# Altium PCB DClassAmp.PcbDoc (part 1 of 3)
Units mm, origin at the board's own origin, x right, y up, seen from the top; angles counter-clockwise.
Board outline 100 x 100 mm, 4 copper layers (Top Layer, Layer 1, Layer 2, Bottom Layer), stack 1.57 mm thick; 192 components, 70 nets, 450 pads, 316 vias.
Unrouted connection lines stored in the file: 103.
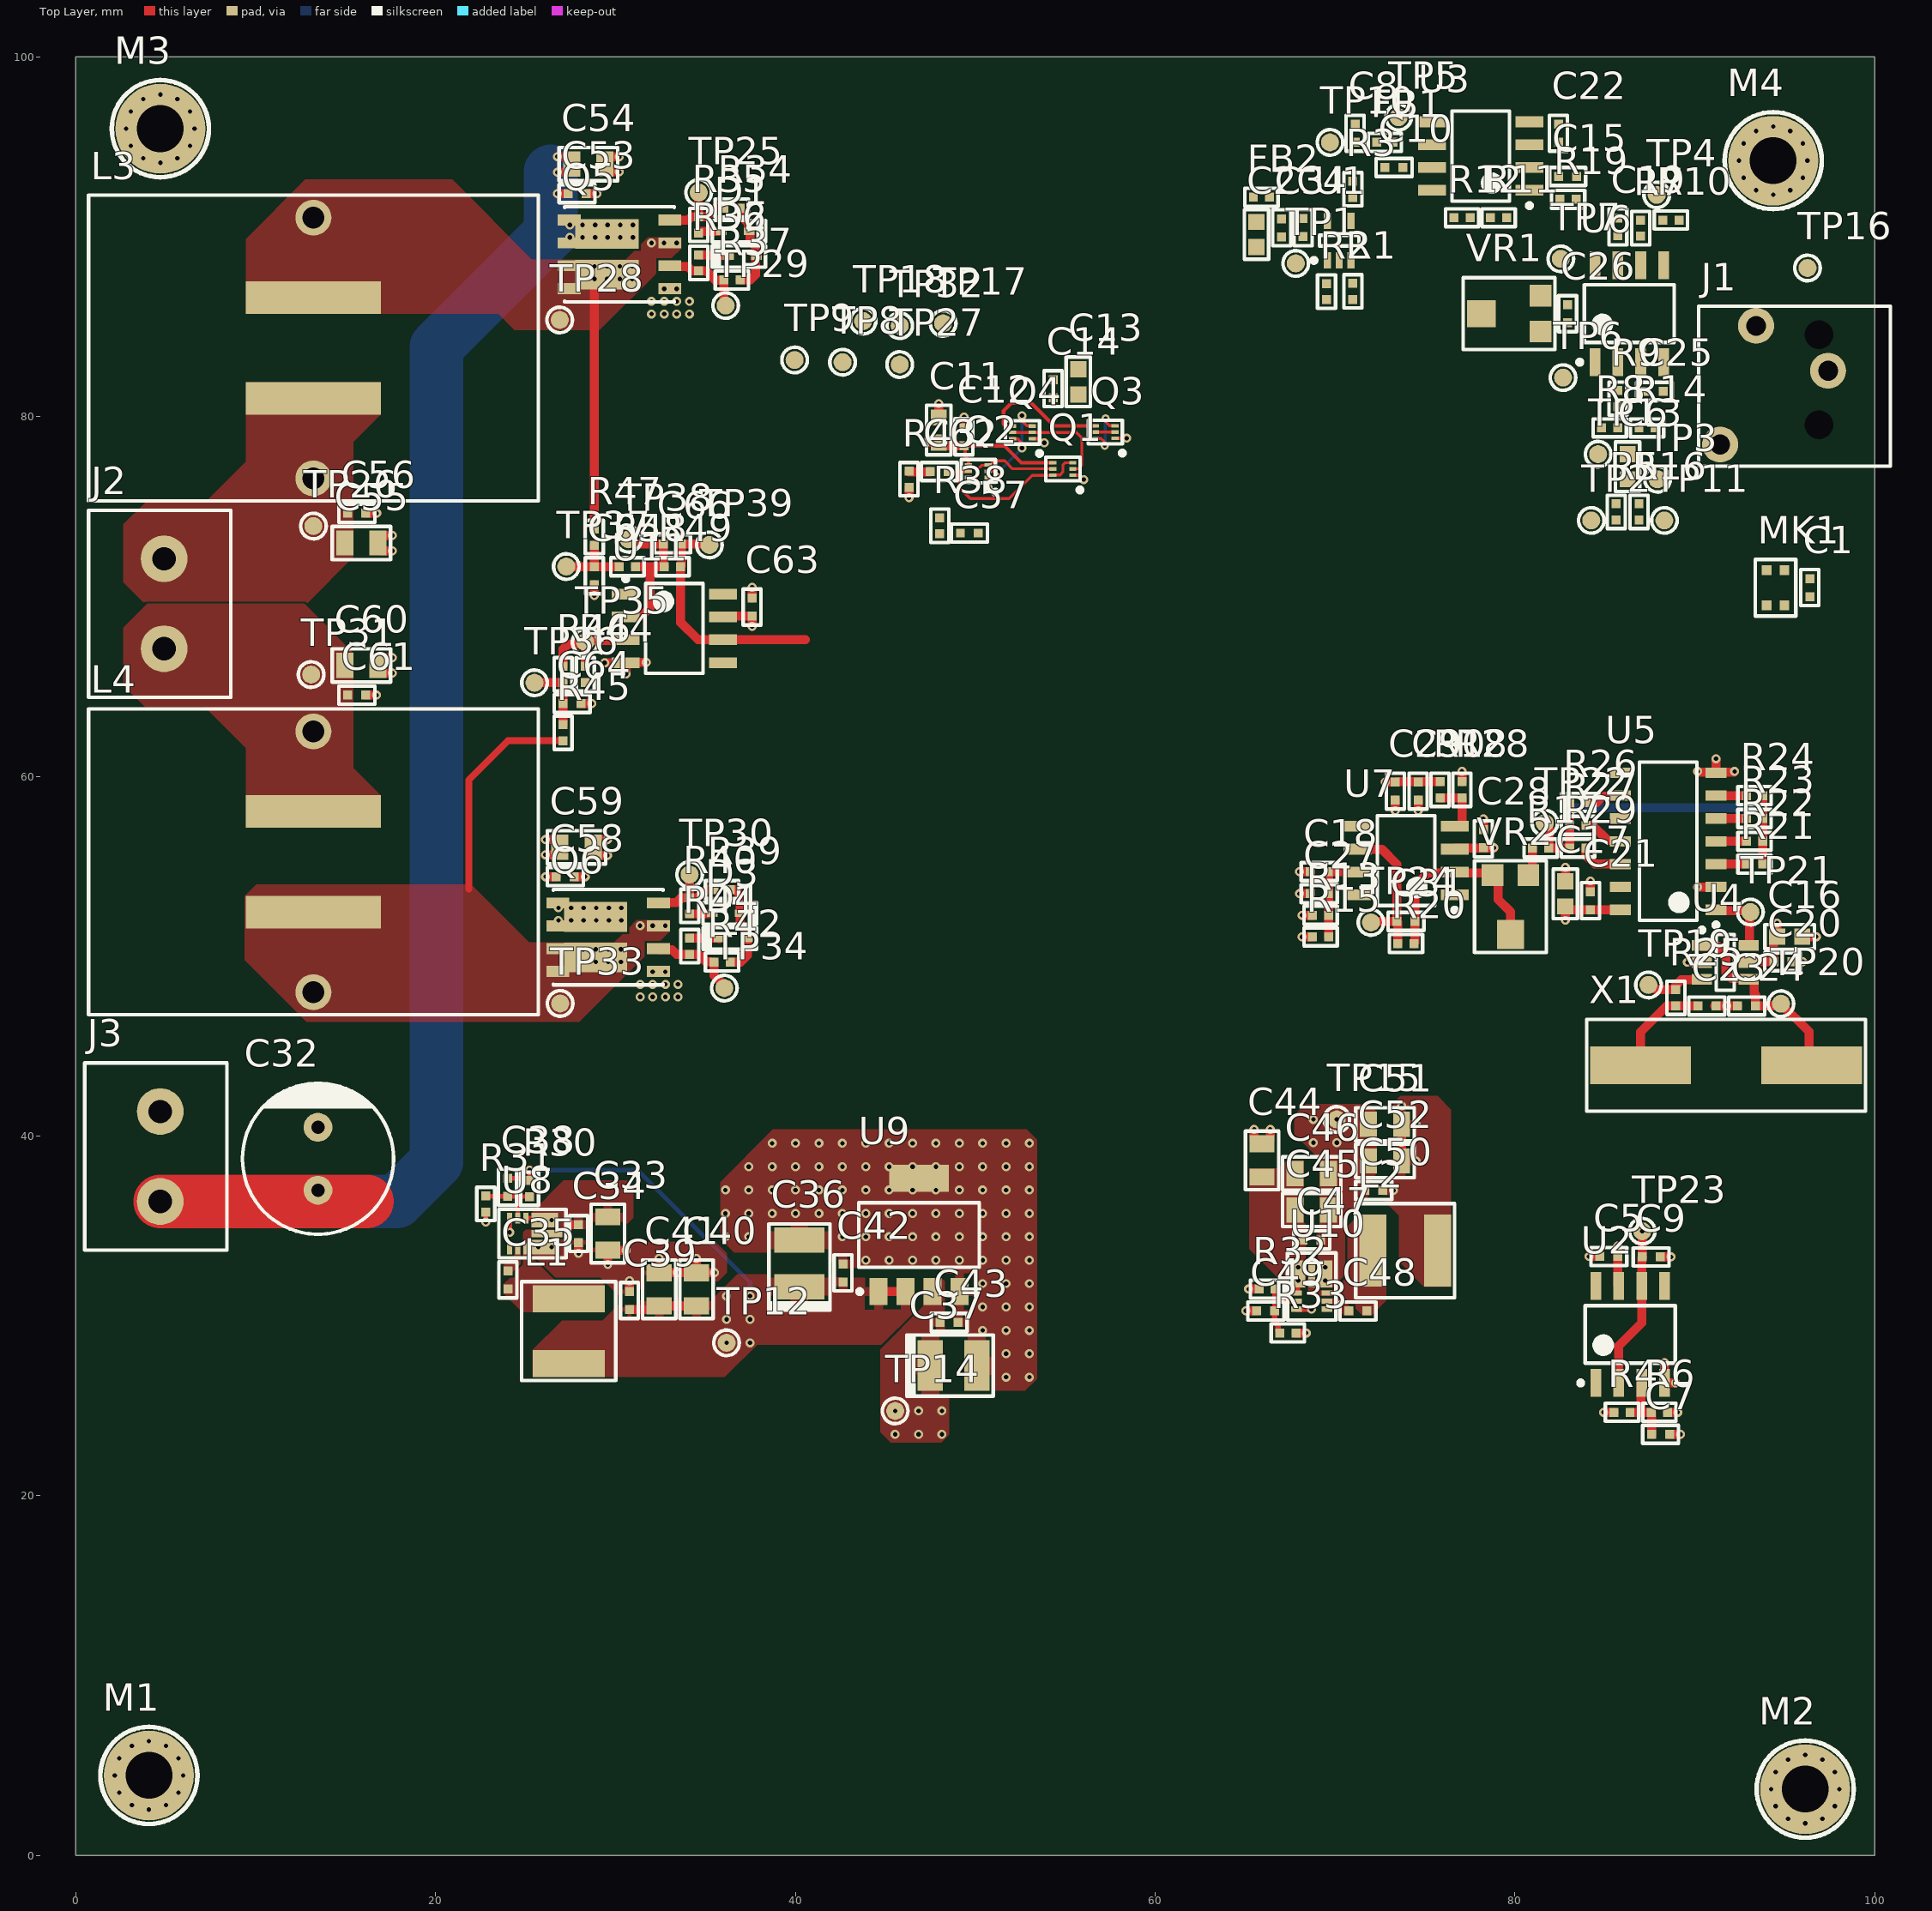
[diagram p0: Top Layer view]
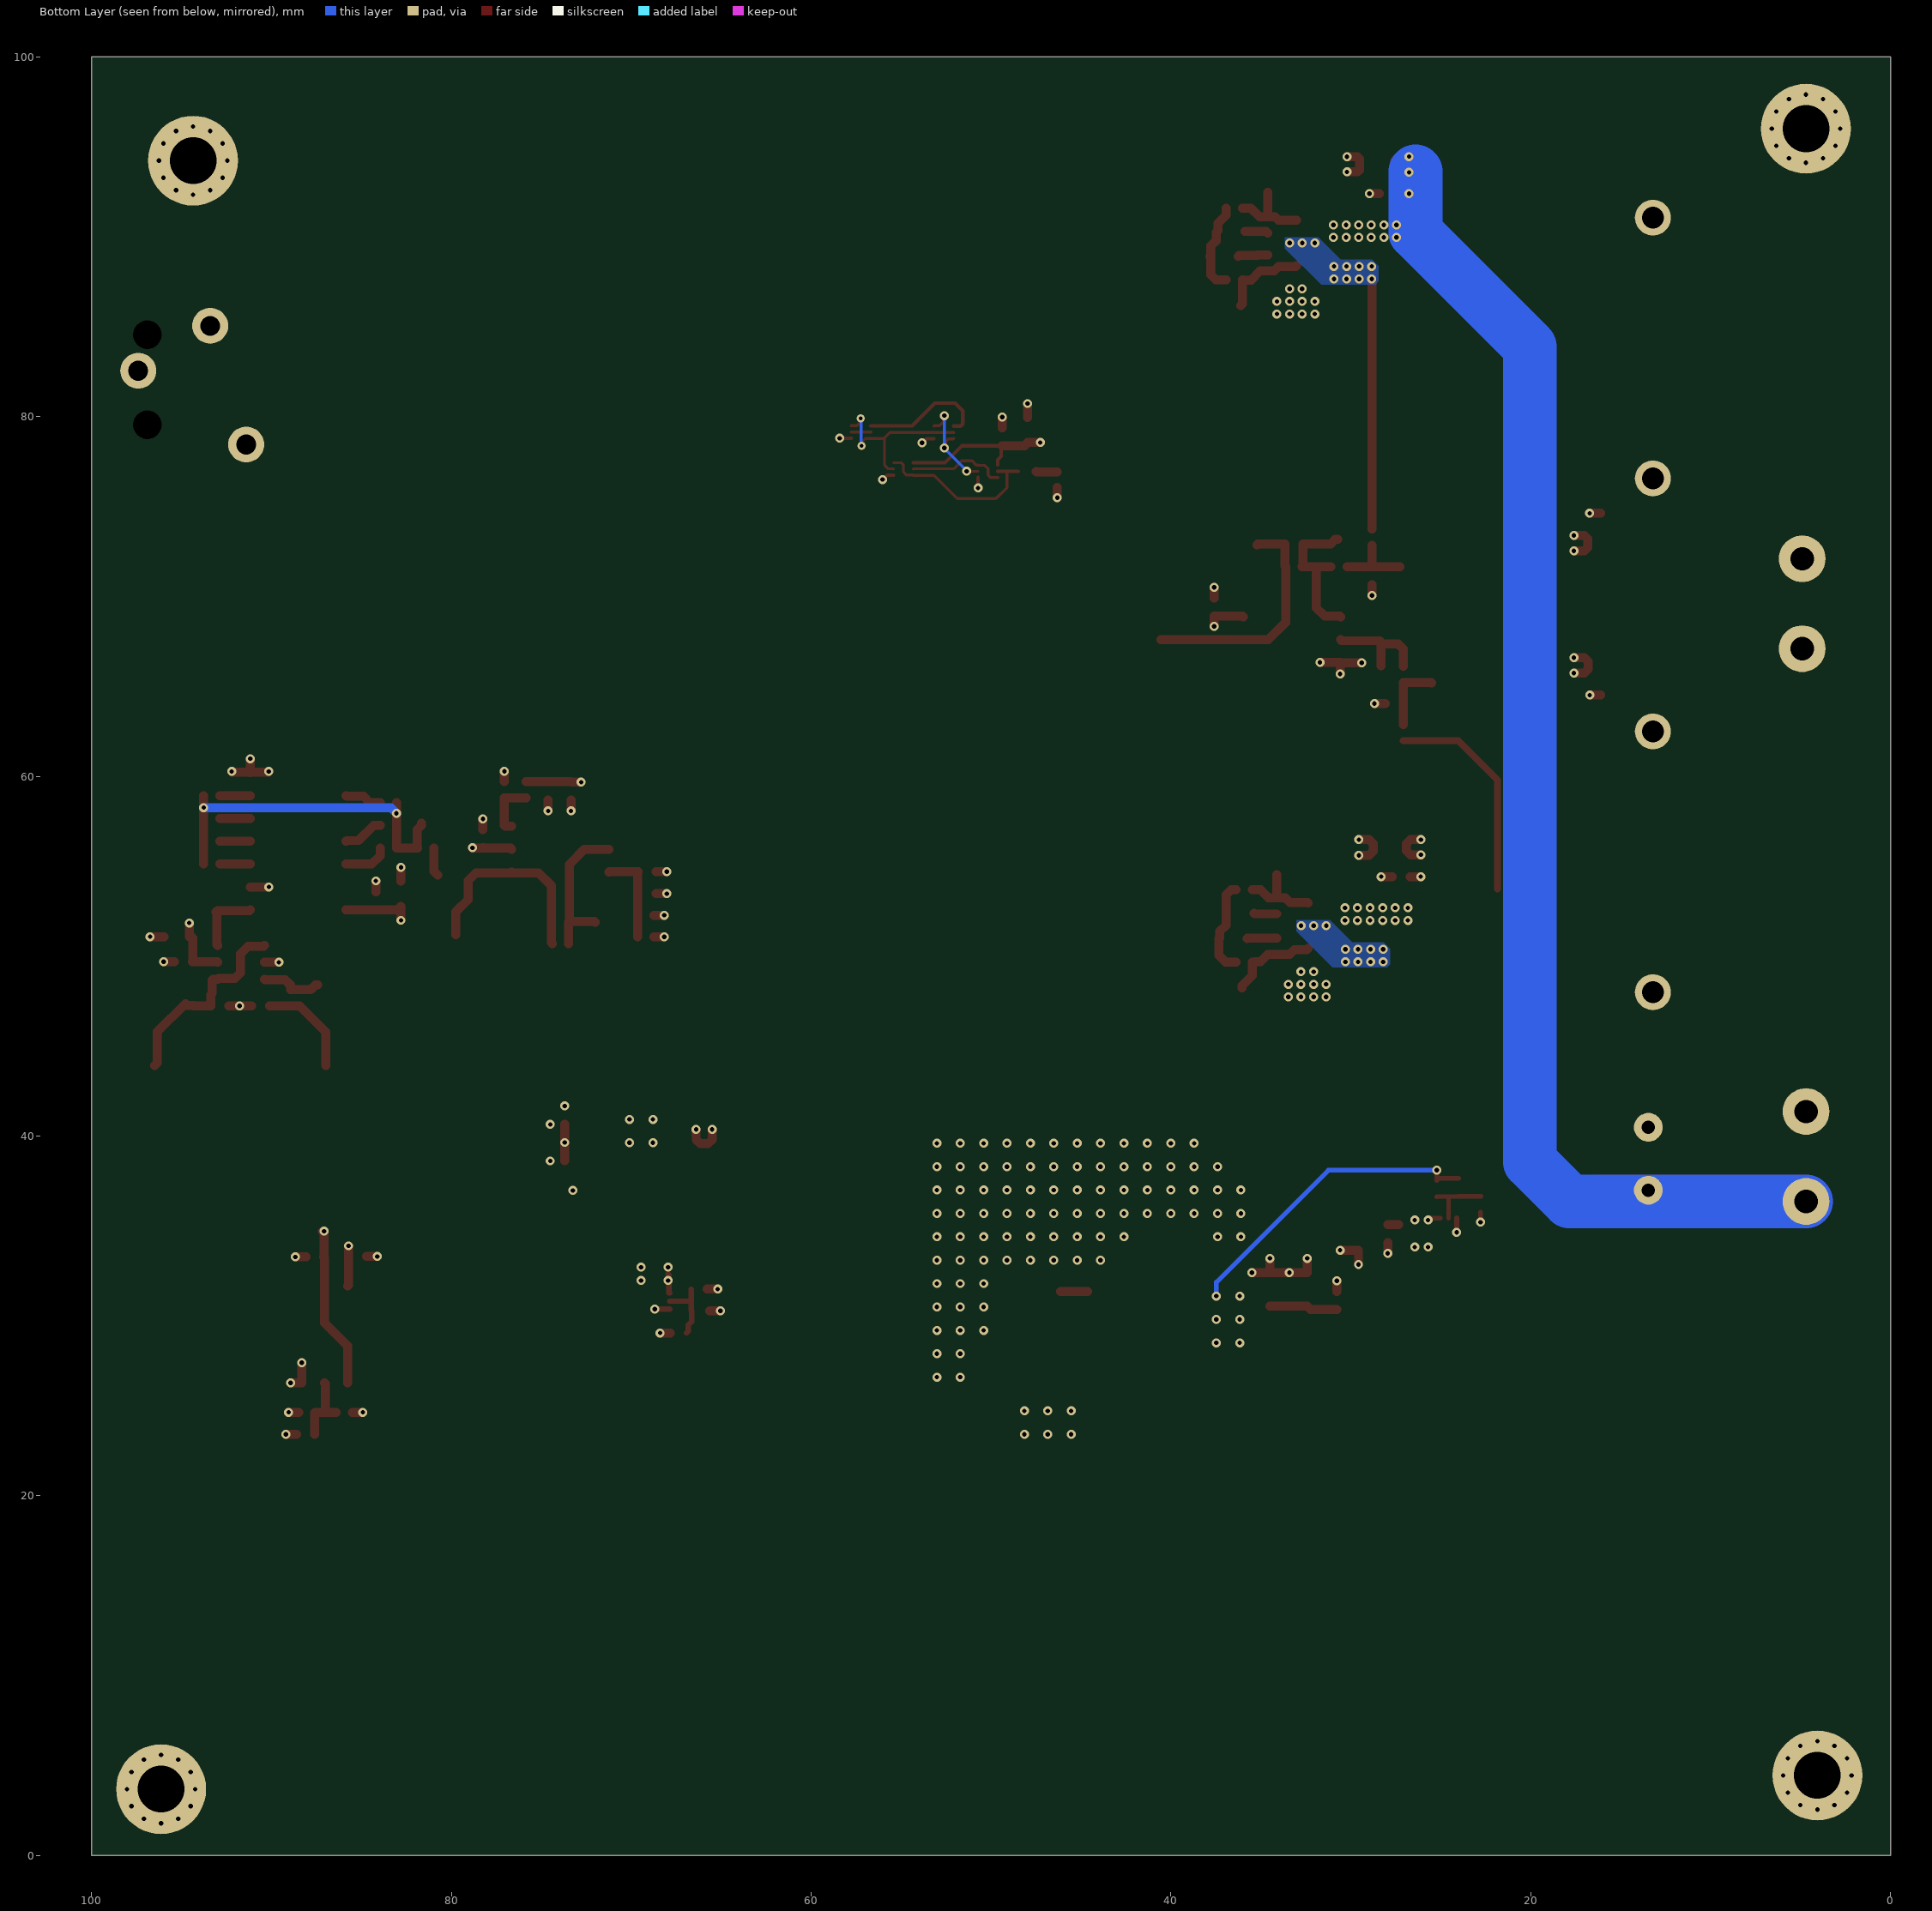
[diagram p1: Bottom Layer view, seen from below]
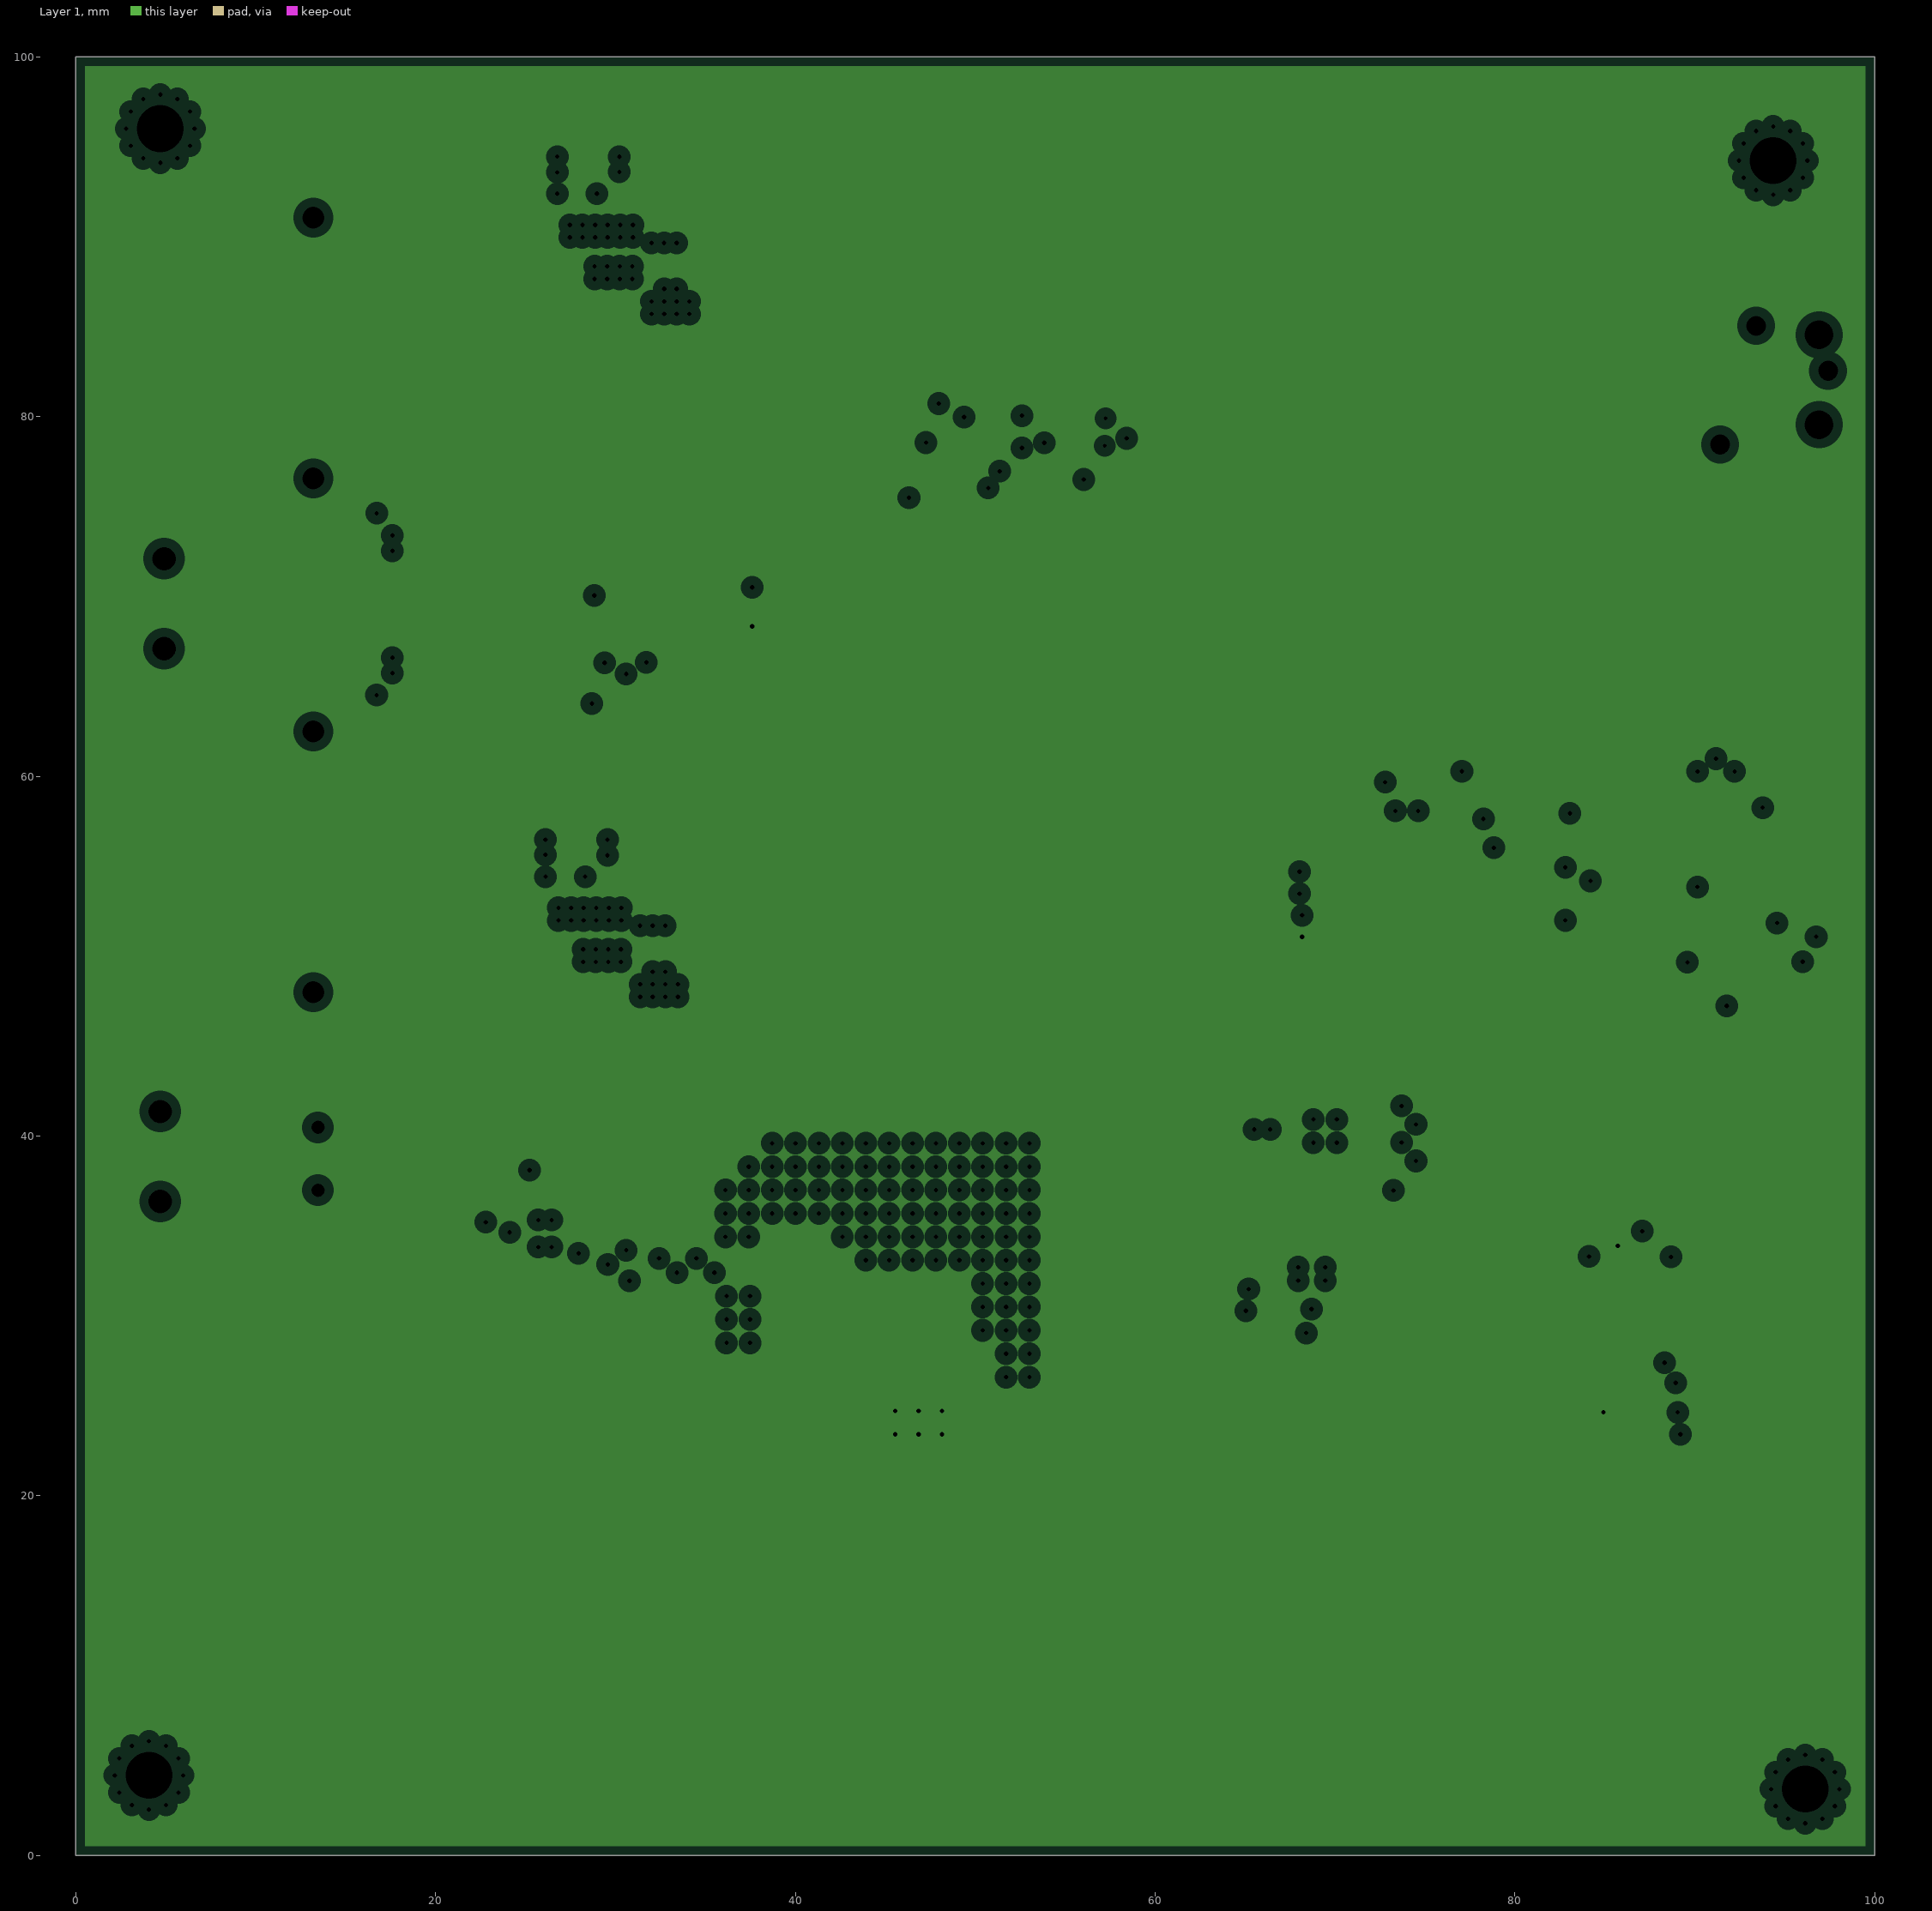
[diagram p2: Layer 1, clearances drawn from the general rule]
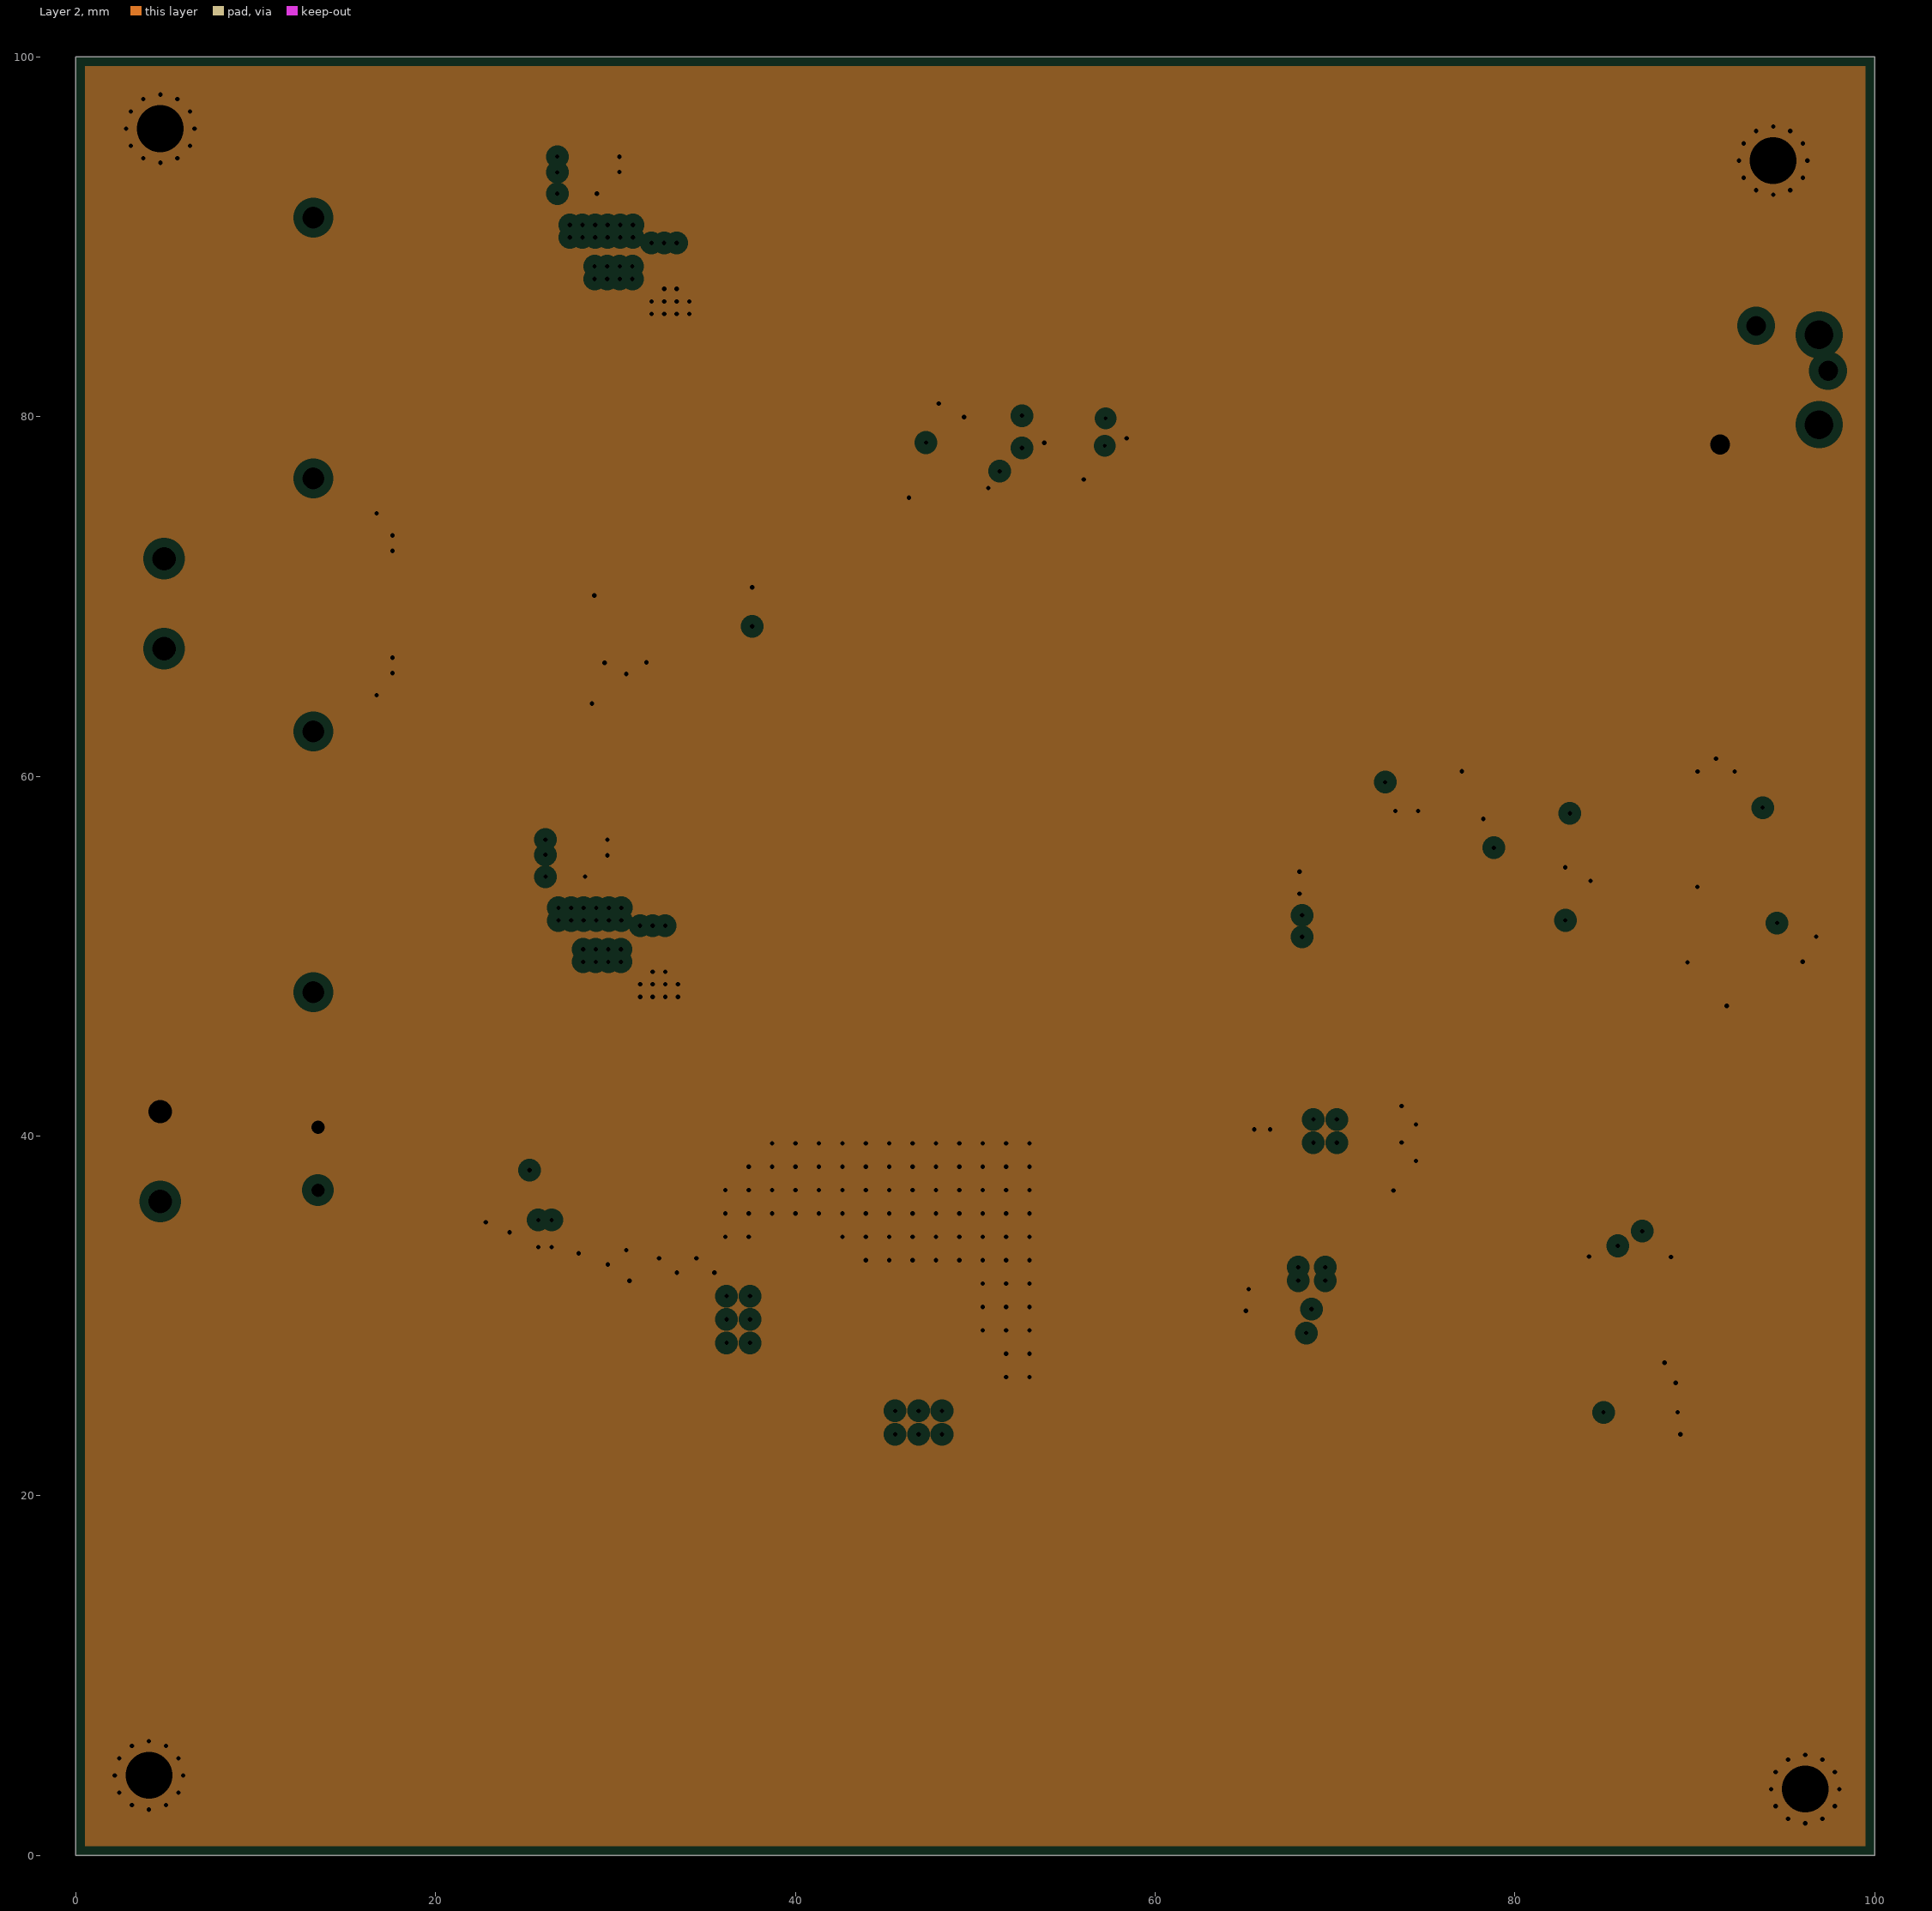
[diagram p3: Layer 2, clearances drawn from the general rule]

## Layer stack, top to bottom
Top Solder: solder mask 0.0102, Solder Resist, Dk 3.5
Top Layer: signal copper 0.035
Dielectric 2: prepreg 0.2, PP-006, Dk 4.1
Layer 1: plane copper 0.0175, net VCCA
Dielectric 1: dielectric 1.065, FR-4, Dk 4.8
Layer 2: plane copper 0.0175, net GND
Dielectric 3: prepreg 0.2, PP-006, Dk 4.1
Bottom Layer: signal copper 0.035
Bottom Solder: solder mask 0.0102, Solder Resist, Dk 3.5

## Board outline
0,0 100,0 100,100 0,100

## Design rules (kind name [scope] priority, off if disabled: settings)
BoardOutlineClearance BoardOutlineClearance_Part [IsComponent] p1: gap=0.4 ignorepadtopadclearanceinfootprint=FALSE except(0: Arc-SplitContinuation Track-SplitContinuation SMDPad-SplitContinuation THPad-SplitContinuation Via-SplitContinuation Fill-SplitContinuation Poly-SplitContinuation Region-SplitContinuation Text-SplitContinuation)
BoardOutlineClearance [IsTrack] p2: gap=0.4 ignorepadtopadclearanceinfootprint=FALSE except(0: Arc-SplitContinuation Track-SplitContinuation SMDPad-SplitContinuation THPad-SplitContinuation Via-SplitContinuation Fill-SplitContinuation Poly-SplitContinuation Region-SplitContinuation Text-SplitContinuation)
Clearance [All] p1: gap=0.127 ignorepadtopadclearanceinfootprint=FALSE except(0: Arc-Hole Track-Hole SMDPad-Hole THPad-Hole Via-Hole Fill-Hole Poly-Hole Region-Hole Text-Hole; 0.09: Arc-Arc Arc-Track Track-Track; 0.254: Arc-Via Arc-Text Track-Via Track-Text SMDPad-Via SMDPad-Text Via-Fill Via-Poly Via-Region Via-Text Fill-Text Poly-Text Region-Text Text-Text; 0.33: Arc-THPad Track-THPad SMDPad-THPad; 0.5: THPad-THPad THPad-Via THPad-Fill THPad-Poly THPad-Region THPad-Text Via-Via)
HoleSize [All] p1: absolutevalues=TRUE maxlimit=6.3 minlimit=0.2 maxpercent=80.000 minpercent=20.000
HoleToHoleClearance [All] p1: gap=0.5 allowstackedmicrovias=TRUE
MinimumAnnularRing [All] p1: minimumring=0.13
PlaneClearance [All] p1: clearance=0.508
PlaneConnect [All] p1: planeconnectstyle=Relief reliefexpansion=0.508 reliefentries=4 reliefconductorwidth=0.254 reliefairgap=0.254
PolygonConnect [All] p1: connectstyle=Relief reliefconductorwidth=0.254 reliefentries=4 polygonreliefangle="90 Angle" airgapwidth=0.254
RoutingVias [All] p1: holewidth=0.25 width=0.5 viastyle="Through Hole" minholewidth=0.2 minwidth=0.45 maxholewidth=0.4 maxwidth=0.8
SilkToSilkClearance [All] p1: silktosilkclearance=0
SilkToSolderMaskClearance [IsPad] p1: minsilkscreentomaskgap=0 clearancetoexposedcopper=TRUE
SolderMaskExpansion SolderMaskExpansion_VIa [isVia] p1: expansion=0.102 istentingtop=TRUE
SolderMaskExpansion [All] p2: expansion=0.05 istentingtop=FALSE
Width [All] p1: maxlimit=50 minlimit=0.09 preferedwidth=0.254
24 further rules are at their usual default settings.

## Classes and differential pairs
component class Designator: C5 C7 C9 C33 C34 C35 C36 C37 C38 C39 C40 C41 C42 C43 C44 C45 C46 C47 C48 C49 C50 C51 C52 L1 L2 R4 R6 R30 R31 R32 R33 TP12 TP14 TP15 TP23 U2 U8 U9 U10
component class DClassAmp: C2 C3 C4 C32 FB2 J2 J3 M1 M2 M3 M4 R1 R2 R3 TP1 U1

## Components (designator, comment, footprint, x,y, rotation, side; value= is the part's Value field where it differs from the comment)
C1 "100nF" C0402 96.393,70.493 r90 top
C2 "1uF" c0603 65.635,90.125 r90 top
C3 "100nF" C0402 67.032,90.498 r90 top
C4 "100pF" C0402 68.227,90.507 r90 top
C5 "100nF" C0402 85.225,33.3 r0 top
C6 "1uF" c0603 86.266,77.216 r270 top
C7 "100nF" C0402 88.1,23.413 r0 top
C8 "10nF" c0402 71.12,95.758 r270 top
C9 "100nF" C0402 87.575,33.275 r0 top
C10 "100nF" C0402 73.279,93.853 r0 top
C11 "1uF" c0603 47.973,79.252 r270 top
C12 "10nF" c0402 49.373,78.877 r270 top
C13 "1uF" c0603 55.725,81.935 r270 top
C14 "10nF" c0402 54.328,81.554 r270 top
C15 "10nF" c0402 82.931,93.353 r0 top
C16 "1uF" c0603 95.275,51.085 r180 top
C17 "1uF" c0603 82.804,53.467 r270 top
C18 "10nF" c0402 69.125,54.7 r0 top
C19 "100nF" C0402 85.725,90.551 r270 top
C20 "10nF" c0402 94.894,49.688 r180 top
C21 "10nF" c0402 84.201,53.086 r270 top
C22 "100nF" C0402 82.423,95.758 r270 top
C23 "12pF" C0402 90.673,47.231 r180 top
C24 "12pF" C0402 92.883,47.23 r0 top
C25 "100nF" C0402 87.757,81.407 r180 top
C26 "12pF" C0402 82.931,85.725 r270 top
C27 "100nF" C0402 69.125,53.473 r180 top
C28 "100nF" C0402 78.25,56.528 r270 top
C29 "10nF" c0402 73.355,59.176 r90 top
C30 "100nF" C0402 74.625,59.176 r270 top
C31 "47pF" C0402 73.945,51.936 r0 top
C32 "220uF" "CAP ALUM S3.5mm D8mm H13mm" 13.462,38.735 r0 top
C33 "10uF" c0805 29.575,34.576 r90 top
C34 "100nF" C0402 27.95,34.576 r270 top
C35 "100nF" C0402 24.025,32 r270 top
C36 "100uF" "CAP TANT B" 40.225,32.914 r90 top
C37 "100uF" "CAP TANT B" 48.8,27.239 r0 top
C38 "47pF" C0402 24,37.148 r90 top
C39 "100nF" C0402 30.775,30.85 r90 top
C40 "22uF" C0805 34.5,31.475 r270 top
C41 "22uF" C0805 32.425,31.475 r270 top
C42 "100nF" C0402 42.65,32.389 r90 top
C43 "100nF" C0402 48.55,29.639 r0 top
C44 "10uF" c0805 65.943,38.645 r270 top
C45 "10uF" c0805 68.707,35.885 r180 top
C46 "10uF" c0805 68.707,37.917 r180 top
C47 "100nF" C0402 68.707,34.225 r0 top
C48 "100nF" C0402 71.275,30.275 r0 top
C49 "47pF" C0402 66.15,30.275 r180 top
C50 "100nF" C0402 72.152,36.975 r180 top
C51 "22uF" C0805 72.777,40.647 r0 top
C52 "22uF" C0805 72.777,38.615 r0 top
C53 "100nF" C0402 27.866,92.4 r180 top
C54 "4.7uF" c0805 28.491,94.037 r180 top
C55 "10uF" c0805 15.875,72.973 r180 top
C56 "100nF" C0402 15.623,74.625 r180 top
C57 "100nF" C0402 49.676,73.525 r0 top
C58 "100nF" C0402 27.213,54.421 r180 top
C59 "4.7uF" c0805 27.831,56.054 r180 top
C60 "10uF" c0805 15.875,66.167 r180 top
C61 "100nF" C0402 15.621,64.516 r180 top
C62 "100nF" C0402 48,76.95 r0 top
C63 "100nF" C0402 37.594,69.414 r270 top
C64 "680pF" c0402 27.587,64.049 r180 top
C65 "680pF" c0402 28.825,71.154 r90 top
C66 "220pF" C0402 33.168,72.924 r180 top
D1 "40V" "SOD-523 ON 502-1E" 36.657,90.303 r180 top
D2 "40V" "SOD-523 ON 502-1E" 37.057,88.906 r0 top
D3 "40V" "SOD-523 ON 502-1E" 36.153,52.381 r180 top
D4 "40V" "SOD-523 ON 502-1E" 36.553,50.984 r0 top
FB1 "68R" FB0402 72.771,95.25 r180 top
FB2 "68R" FB0402 65.913,92.202 r180 top
J1 "SJ-2509N" "CONN SPKR JACK SJ-2509N" 97.409,82.55 r180 top
J2 "691137710002" "CON TERM BLK 2 691137710002" 4.658,69.596 r270 top
J3 "691137710002" "CON TERM BLK 2 691137710002" 4.445,38.862 r270 top
L1 "6.8uH" "IND 4.9x4.9x3.1mm" 27.4,29.15 r270 top
L2 "6.8uH" "IND 4.9x4.9x3.1mm" 73.9,33.625 r0 top
L3 "22uH Combo" "IND COMBO 8x8mm SMD 24.5x16.6mm TH" 13.208,83.814 r270 top
L4 "22uH Combo" "IND COMBO 8x8mm SMD 24.5x16.6mm TH" 13.208,55.245 r90 top
M1 "M2.0" "MECH M2.0 CHASSIS" 4.064,4.445 r0 top
M2 "M2.0" "MECH M2.0 CHASSIS" 96.139,3.683 r0 top
M3 "M2.0" "MECH M2.0 CHASSIS" 4.699,96.012 r0 top
M4 "M2.0" "MECH M2.0 CHASSIS" 94.361,94.234 r0 top
MK1 "CMM-2718AT-42308-TR" "MICROPHONE MEMS SMD CMM-2718AT-42308-TR" 94.488,70.485 r0 top
Q1 "DMC31D5UDJ-7" "SOT963 6pin 1x1mm DIODES" 54.872,77.089 r180 top
Q2 "DMC31D5UDJ-7" "SOT963 6pin 1x1mm DIODES" 50.173,76.962 r180 top
Q3 "DMC31D5UDJ-7" "SOT963 6pin 1x1mm DIODES" 57.225,79.141 r180 top
Q4 "DMC31D5UDJ-7" "SOT963 6pin 1x1mm DIODES" 52.625,79.125 r180 top
Q5 "TSM6502CR RLG" "PDFN-8 DUAL 5X6MM" 30.226,89.027 r180 top
Q6 "TSM6502CR RLG" "PDFN-8 DUAL 5X6MM" 29.591,51.054 r180 top
R1 "0R" R0402 70.993,86.995 r270 top
R2 "0R" R0402 69.528,86.927 r90 top
R3 "0R" R0402 70.993,92.616 r90 top
R4 "10k00" r0402 85.975,24.638 r180 top
R5 "0R" R0402 85.631,74.676 r90 top
R6 "10k00" r0402 88.05,24.638 r180 top
R7 "15k0" r0402 86.995,90.507 r270 top
R8 "10k0" r0402 85.25,79.375 r0 top
R9 "10k0" r0402 85.725,81.026 r270 top
R10 "15k0" r0402 88.646,90.932 r0 top
R11 "10k0" r0402 79.121,91.059 r180 top
R12 "0R" R0402 77.089,91.059 r180 top
R13 "0R" R0402 69.225,52.275 r180 top
R14 "10k0" r0402 87.326,79.375 r0 top
R15 "0R" R0402 69.225,51.075 r180 top
R16 "0R" R0402 86.901,74.676 r90 top
R17 "33k0" r0402 81.407,56.007 r0 top
R18 "0R" R0402 75.84,59.276 r270 top
R19 "100k" r0402 82.931,92.083 r0 top
R20 "100k" r0402 73.92,50.703 r0 top
R21 "0R" R0402 93.345,55.118 r180 top
R22 "0R" R0402 93.345,56.388 r180 top
R23 "0R" R0402 93.345,57.658 r180 top
R24 "0R" R0402 93.345,58.928 r180 top
R25 "0R" R0402 88.95,47.705 r270 top
R26 "0R" R0402 83.483,58.547 r0 top
R27 "0R" R0402 83.483,57.277 r0 top
R28 "0R" R0402 77.053,59.276 r270 top
R29 "0R" R0402 83.483,56.007 r0 top
R30 "120k" r0402 25.225,37.048 r90 top
R31 "30k0" r0402 22.788,36.2 r90 top
R32 "120k" r0402 66.25,31.488 r180 top
R33 "30k0" r0402 67.4,29.05 r180 top
R34 "10R0" R0402 36.45,91.6 r0 top
R35 "10R0" R0402 34.625,90.684 r270 top
R36 "10R0" R0402 34.625,88.525 r90 top
R37 "10R0" R0402 36.45,87.6 r0 top
R38 "10k0" r0402 48.025,73.906 r90 top
R39 "10R0" R0402 35.9,53.7 r0 top
R40 "10R0" R0402 34.125,52.825 r270 top
R41 "10R0" R0402 34.125,50.525 r90 top
R42 "10R0" R0402 35.9,49.675 r0 top
R43 "10k0" r0402 46.316,76.546 r270 top
R44 "10k0" r0402 28.325,65.65 r90 top
R45 "10k0" r0402 27.087,62.398 r90 top
R46 "100k" r0402 27.087,65.7 r270 top
R47 "10k0" r0402 28.825,73.325 r270 top
R48 "100k" r0402 30.686,71.654 r180 top
R49 "10k0" r0402 33.143,71.654 r0 top
TP1 "1mm" TESTPOINT_SMT 67.818,88.519 r90 top
TP2 "1mm" TESTPOINT_SMT 84.246,74.229 r180 top
TP3 "1mm" TESTPOINT_SMT 87.929,76.515 r180 top
TP4 "1mm" TESTPOINT_SMT 87.884,92.329 r180 top
TP5 "1mm" TESTPOINT_SMT 73.533,96.647 r270 top
TP6 "1mm" TESTPOINT_SMT 82.677,82.169 r180 top
TP7 "1mm" TESTPOINT_SMT 82.55,88.773 r180 top
TP8 "1mm" TESTPOINT_SMT 42.625,83.025 r270 top
TP9 "1mm" TESTPOINT_SMT 39.958,83.152 r270 top
TP10 "1mm" TESTPOINT_SMT 69.723,95.25 r270 top
TP11 "1mm" TESTPOINT_SMT 88.31,74.229 r180 top
TP12 "1mm" TESTPOINT_SMT 36.175,28.5 r0 top
TP13 "1mm" TESTPOINT_SMT 84.627,77.912 r180 top
TP14 "1mm" TESTPOINT_SMT 45.55,24.714 r180 top
TP15 "1mm" TESTPOINT_SMT 70.1,40.925 r0 top
TP16 "1mm" TESTPOINT_SMT 96.266,88.265 r90 top
TP17 "1mm" TESTPOINT_SMT 48.213,85.184 r270 top
TP18 "1mm" TESTPOINT_SMT 43.768,85.311 r270 top
TP19 "1mm" TESTPOINT_SMT 87.425,48.4 r180 top
TP20 "1mm" TESTPOINT_SMT 94.788,47.357 r180 top
TP21 "1mm" TESTPOINT_SMT 93.091,52.451 r180 top
TP22 "1mm" TESTPOINT_SMT 81.661,57.404 r270 top
TP23 "1mm" TESTPOINT_SMT 87.08,34.708 r180 top
TP24 "1mm" TESTPOINT_SMT 72,51.878 r270 top
TP25 "1mm" TESTPOINT_SMT 34.625,92.462 r180 top
TP26 "1mm" TESTPOINT_SMT 13.208,73.914 r180 top
TP27 "1mm" TESTPOINT_SMT 45.8,82.898 r270 top
TP28 "1mm" TESTPOINT_SMT 26.9,85.375 r90 top
TP29 "1mm" TESTPOINT_SMT 36.125,86.175 r90 top
TP30 "1mm" TESTPOINT_SMT 34.121,54.54 r180 top
TP31 "1mm" TESTPOINT_SMT 13.081,65.659 r180 top
TP32 "1mm" TESTPOINT_SMT 45.8,85.057 r270 top
TP33 "1mm" TESTPOINT_SMT 26.924,47.371 r90 top
TP34 "1mm" TESTPOINT_SMT 36.05,48.225 r90 top
TP35 "1mm" TESTPOINT_SMT 28.317,67.463 r90 top
TP36 "1mm" TESTPOINT_SMT 25.5,65.2 r90 top
TP37 "1mm" TESTPOINT_SMT 27.268,71.663 r90 top
TP38 "1mm" TESTPOINT_SMT 30.73,73.178 r90 top
TP39 "1mm" TESTPOINT_SMT 35.219,72.864 r90 top
U1 "TLV3601DCKR" "SC70 5pin TI DCK" 70.231,89.789 r90 top
U2 "TLV172IDR" "SO8 6.2x5mm TI D0008A" 86.412,28.97 r90 top
U3 "TLV172IDR" "SO8 6.2x5mm TI D0008A" 78.105,94.488 r180 top
U4 "50mA" "SOT-23 6 2.9x2.8mm TI DBV0006A" 91.694,49.657 r0 top
U5 "7b Counter" "SOIC14 8.65x3.9" 88.519,56.388 r180 top
U6 "TLV172IDR" "SO8 6.2x5mm TI D0008A" 86.36,85.725 r90 top
U7 "TLV172IDR" "SO8 6.2x5mm TI D0008A" 73.95,55.315 r180 top
U8 "AP63357DV-7" "VDFN3020-13 AP63357DV-7" 25.244,34.576 r270 top
U9 "3.3V" "SOT223-5 TI NDC0005A" 46.875,34.494 r90 top
U10 "AP63357DV-7" "VDFN3020-13 AP63357DV-7" 68.707,31.496 r0 top
U11 "TLV172IDR" "SO8 6.2x5mm TI D0008A" 33.27,68.225 r0 top
VR1 "20k" "RV TC33X-2" 79.629,85.725 r90 top
VR2 "20k" "RV TC33X-2" 79.756,52.705 r180 top
X1 "4.000MHz" "XTAL 2pin" 91.74,43.928 r180 top

## Footprints (in the part's own frame and the unit in brackets; to place one, negate y for a bottom-side part, rotate by r counter-clockwise, add the part's x,y. Pads: shape width x height; smd on the part's side, far side on the other; paste and mask are expansions set on the pad)
C0402 [mm]
  rect 0.5x0.5 smd: 1(-0.5,0) 2(0.5,0)
  silkscreen extent -1,-0.5 1,0.5, body extent -0.5,-0.25 0.5,0.25, height 0.51
c0402 [mm]
  rect 0.5x0.5 smd: 1(-0.5,0) 2(0.5,0)
  silkscreen extent -1,-0.5 1,0.5, body extent -0.5,-0.25 0.5,0.25, height 0.51
c0603 [mm]
  rect 0.9x0.9 smd: 1(-0.7,0) 2(0.7,0)
  silkscreen extent -1.38,-0.67 1.38,0.67, body extent -0.8,-0.4 0.8,0.4, height 0.81
c0805 [mm]
  rect 0.95x1.4 smd: 1(-0.925,0) 2(0.925,0)
  silkscreen extent -1.63,-0.92 1.63,0.92, body extent -1,-0.62 1,0.63, height 0.61
C0805 [mm]
  rect 0.95x1.4 smd: 1(-0.925,0) 2(0.925,0)
  silkscreen extent -1.63,-0.92 1.63,0.92, body extent -1,-0.62 1,0.63, height 0.61
"CAP ALUM S3.5mm D8mm H13mm" [mm]
  round 1.6 hole 0.75: 1(0,1.75) 2(0,-1.75)
  silkscreen extent -4.2,-4.2 4.2,4.2, body extent -4.25,-4.25 4.25,4.28, height 13.02
"CAP TANT B" [mm] "Molded Capacitor, 2-Leads, Body 3.50x2.85mm, IPC Medium Density"
  rect 1.4x2.8 smd: 1(-1.3,0) 2(1.3,0)
  silkscreen extent -2.6,-1.7 2.2,1.7, body extent -1.75,-1.4 1.75,1.4, height 1.9
"CON TERM BLK 2 691137710002" [mm]
  round 2.6 hole 1.3: 1(-2.5,0.25) 2(2.5,0.25)
  silkscreen extent -5.2,-3.95 5.2,3.95, body extent -5,-3.75 5,3.75, height 11.5
"CONN SPKR JACK SJ-2509N" [mm]
  round 2 hole 1.1: 1(0,0) 2(4,-2.5) 3(6,4.1)
  round 0 hole 1.6 unplated: 4(0.5,-2) 5(0.5,3)
  silkscreen extent -3.47,-3.59 7.2,5.3, body extent -6.47,-3.39 6.53,5.01, height 5.02
FB0402 [mm]
  rect 0.5x0.5 smd: 1(-0.45,0) 2(0.45,0)
  silkscreen extent -0.92,-0.5 0.92,0.5, body extent -0.53,-0.25 0.47,0.25, height 0.36
"IND 4.9x4.9x3.1mm" [mm] "Precision Wire Wound Inductor, 2-Leads, Body 4.90x4.90mm, IPC Medium Density"
  rect 1.5x4 smd: 1(-1.8,0) 2(1.8,0)
  silkscreen extent -2.75,-2.61 2.75,2.61, body extent -2.55,-2.45 2.55,2.45, height 3.2
"IND COMBO 8x8mm SMD 24.5x16.6mm TH" [mm]
  round 2 hole 1.2: 1(-7.25,0) 2(7.25,0)
  rect 1.8x7.5 smd: 1(-2.8,0) 2(2.8,0)
  silkscreen extent -8.5,-12.5 8.5,12.5
"MECH M2.0 CHASSIS" [mm]
  round 5 hole 2.6: 1(0,0)
  silkscreen extent -2.7,-2.7 2.7,2.7
"MICROPHONE MEMS SMD CMM-2718AT-42308-TR" [mm]
  rect 0.54x0.56 smd: 1(0.495,0.975) 2(0.495,-0.975) 3(-0.495,-0.975) 4(-0.495,0.975)
  silkscreen extent -1.12,-1.58 1.12,1.58, body extent -0.92,-1.38 0.92,1.38, height 0.95
"PDFN-8 DUAL 5X6MM" [mm] "SON, 8-Leads, Body 5.75x4.90mm, Pitch 1.27mm, IPC Medium Density"
  rect 1.27x0.61 smd: 1(-2.795,1.905) 2(-2.795,0.635) 3(-2.795,-0.635) 4(-2.795,-1.905) 5(2.795,-1.905) 6(2.795,-0.635) 7(2.795,0.635) 8(2.795,1.905)
  rect 3.52x1.655 smd: 5(0.7,-1.127) 8(0.7,1.128)
  silkscreen extent -3.05,-2.65 3.05,2.65, body extent -2.9,-2.5 2.9,2.5, height 1.1
R0402 [mm]
  rect 0.5x0.5 smd: 1(-0.425,0) 2(0.475,0)
  silkscreen extent -0.9,-0.5 0.95,0.5, body extent -0.5,-0.25 0.5,0.25, height 0.36
r0402 [mm]
  rect 0.5x0.5 smd: 1(-0.425,0) 2(0.475,0)
  silkscreen extent -0.9,-0.5 0.95,0.5, body extent -0.5,-0.25 0.5,0.25, height 0.36
"RV TC33X-2" [mm]
  rect 1.2x1.2 smd: 1(-1,-1.8) 3(1,-1.8)
  rect 1.5x1.6 smd: 2(0,1.5)
  silkscreen extent -2,-2.6 2,2.5, body extent -1.8,-1.91 1.8,2.05, height 1.13
"SC70 5pin TI DCK" [mm]
  rect 0.9x0.4 smd: 1(-1.1,0.65) 2(-1.1,0) 3(-1.1,-0.65) 4(1.1,-0.65) 5(1.1,0.65)
  silkscreen extent -1.22,-1.1 0.3,1.52, body extent -1.2,-1.07 1.2,1.07, height 1.1
"SO8 6.2x5mm TI D0008A" [mm]
  rect 1.55x0.6 smd: 1(-2.7,1.905) 2(-2.7,0.635) 3(-2.7,-0.635) 4(-2.7,-1.905) 5(2.7,-1.905) 6(2.7,-0.635) 7(2.7,0.635) 8(2.7,1.905)
  silkscreen extent -2.82,-2.5 1.6,2.88, body extent -3,-2.45 3,2.45, height 1.75
"SOD-523 ON 502-1E" [mm] "SODFL, 2-Leads, Body 0.75x1.60mm, IPC Medium Density"
  rect 0.6x0.4 smd: 1(-0.78,0) 2(0.78,0)
  silkscreen extent -1.68,-0.6 1.28,0.6, body extent -0.8,-0.4 0.8,0.4, height 0.7
"SOIC14 8.65x3.9" [mm] "SOIC, 14-Leads, Body 8.65x3.90mm, Pitch 1.27mm, IPC Medium Density"
  rect 1.18x0.58 smd: 1(-2.66,3.81) 2(-2.66,2.54) 3(-2.66,1.27) 4(-2.66,0) 5(-2.66,-1.27) 6(-2.66,-2.54) 7(-2.66,-3.81) 8(2.66,-3.81) 9(2.66,-2.54) 10(2.66,-1.27) 11(2.66,0) 12(2.66,1.27) 13(2.66,2.54) 14(2.66,3.81)
  silkscreen extent -2.79,-4.4 1.6,4.77, body extent -3,-4.4 3,4.4, height 1.75
"SOT223-5 TI NDC0005A" [mm] "SOT223, 5-Leads, Body 6.50x7.00mm (avg), Pitch 1.50mm, IPC Medium Density"
  rect 1.5x1 smd: 1(-3.15,2.25) 2(-3.15,0.75) 3(-3.15,-0.75) 4(-3.15,-2.25)
  rect 1.5x3.3 smd: 5(3.15,0)
  silkscreen extent -3.27,-3.35 1.8,3.42, body extent -3.5,-3.35 3.5,3.35, height 1.8
"SOT963 6pin 1x1mm DIODES" [mm] "SOTFL, 6-Leads, Body 1.00x1.00mm, Pitch 0.35mm, IPC Medium Density"
  rect 0.4x0.2 smd: 1(-0.55,0.35) 2(-0.55,0) 3(-0.55,-0.35) 4(0.55,-0.35) 5(0.55,0) 6(0.55,0.35)
  silkscreen extent -1.07,-0.65 0.95,1.29, body extent -0.5,-0.52 0.5,0.52, height 0.5
"SOT-23 6 2.9x2.8mm TI DBV0006A" [mm] "SOT23, 6-Leads, Body 2.90x2.80mm, Pitch 0.95mm, IPC Medium Density"
  rect 1.1x0.6 smd: 1(-1.3,0.95) 2(-1.3,0) 3(-1.3,-0.95) 4(1.3,-0.95) 5(1.3,0) 6(1.3,0.95)
  silkscreen extent -1.42,-1.55 0.5,1.92, body extent -1.5,-1.53 1.5,1.53, height 1.45
TESTPOINT_SMT [mm] "testpoint smt"
  round 1 smd: 1(0,0)
  silkscreen extent -0.71,-0.71 0.71,0.71
"VDFN3020-13 AP63357DV-7" [mm] "SON, 12-Leads, Body 3.00x2.00mm, Pitch 0.45mm, IPC Medium Density"
  rect 0.8x1.5 smd: 1(-0.75,0.825) 8(0.75,0.825)
  rect 0.6x0.3 smd: 2(-0.85,-0.225) 3(-0.85,-0.675) 4(-0.85,-1.125) 5(0.85,-1.125) 6(0.85,-0.675) 7(0.85,-0.225)
  rect 0.4x1.73 smd: 9(0,0.94)
  silkscreen extent -1.35,-1.73 1.35,2, body extent -1.03,-1.53 1.03,1.53, height 0.85
"XTAL 2pin" [mm]
  rect 5.6x2.1 smd: 1(4.75,0) 2(-4.75,0)
  silkscreen extent -7.75,-2.55 7.75,2.55, body extent -6.35,-2.35 6.35,2.35, height 4.18

## Part data
C1 C3 C5 C7 C9 C10 C19 C22 C25 C27 C28 C30 C34 C35 C39 C42 C43 C47 C48 C50 C53 C56 C57 C58 C61 C62 C63: library part "CAP CER 100nF 25V X5R 0402", "Cap Ceramic 0.1uF 25V X5R 10% Pad SMD 0402 85¡ãC T/R / Multi Layer Ceramic Capacitor (MLCC)", Case Code (Imperial)=0402, Case Code (Metric)=1005, Dielectric=X5R, Manufacturer=Samsung, Manufacturer Part Number=CL05A104KA5NNNC, Max Operating Temperature=85°C, Min Operating Temperature=-55°C, Package Quantity=1, Supplier Part Number 1=1276-1043-1-ND, Tolerance=10%, Voltage=25V, Capacitance=100nF, Case/Package=0402, Category="Ceramic Capacitors", ComponentLink1Description=https://datasheet.ciiva.com/25802/cl05a104ka5nnnc-25802704.pdf?src-supplier=Digi-Key, ComponentLink1URL=https://datasheet.ciiva.com/25802/cl05a104ka5nnnc-25802704.pdf?src-supplier=Digi-Key, ComponentLink2Description=https://datasheet.ciiva.com/26838/getdatasheetpartid-357412-26838142.pdf?src-supplier=Verical, ComponentLink2URL=https://datasheet.ciiva.com/26838/getdatasheetpartid-357412-26838142.pdf?src-supplier=Verical, ComponentLink3Description=https://datasheet.ciiva.com/16437/cl05a104ka5nnnc-16437369.pdf?src-supplier=Future+Electronics, ComponentLink3URL=https://datasheet.ciiva.com/16437/cl05a104ka5nnnc-16437369.pdf?src-supplier=Future+Electronics, ComponentLink4Description=https://datasheet.ciiva.com/26309/mlcc-catalogdownload2013-eng-26309014.pdf?src-supplier=Distrelec, ComponentLink4URL=https://datasheet.ciiva.com/26309/mlcc-catalogdownload2013-eng-26309014.pdf?src-supplier=Distrelec, Construction=Flat, Depth=0.5mm, Height=0.5mm, Lead Free="Lead Free", Length=1mm, Mount="Surface Mount", Packaging="Tape and Reel", Pricing 1="1=0.10000, 10=0.01100, 50=0.00600, 100=0.00490, 500=0.00346, 1000=0.00272, 2500=0.00248, 5000=0.00228 (USD)", Radiation Hardening=No, RoHS=Yes, Series=CL, Stock 1=8053194, Supplier 1=Digi-Key, Thickness=0.022inch, Voltage Rating=25V, Voltage Rating (DC)=25V, Width=0.02inch
C2 C6 C11 C13 C16 C17: library part "CAP CER 1uF 50V X5R 0603", "Multilayer Ceramic Capacitors (High dielectric type), 50V, 1 uF, ± 10 %, 0603, X5R, RoHS", Case Code (Imperial)=0603, Case Code (Metric)=1608, Dielectric=X5R, Manufacturer="Taiyo Yuden", Manufacturer Part Number=UMK107BJ105KA-T, Max Operating Temperature=85°C, Min Operating Temperature=-55°C, Package Quantity=1, Supplier Part Number 1=587-2400-1-ND, Tolerance=10%, Voltage Rating=50V, Capacitance=1uF, Case/Package=0603, Category="Ceramic Capacitors", ComponentLink1Description=https://datasheet.ciiva.com/134/umk107bj105ka-t-ss-134740.pdf?src-supplier=Digi-Key, ComponentLink1URL=https://datasheet.ciiva.com/134/umk107bj105ka-t-ss-134740.pdf?src-supplier=Digi-Key, ComponentLink2Description=https://datasheet.ciiva.com/11601/umk107bj105ka-t-ss-11601811.pdf?src-supplier=Avnet, ComponentLink2URL=https://datasheet.ciiva.com/11601/umk107bj105ka-t-ss-11601811.pdf?src-supplier=Avnet, ComponentLink3Description=https://datasheet.ciiva.com/5744/1697715-5744913.pdf?src-supplier=Farnell, ComponentLink3URL=https://datasheet.ciiva.com/5744/1697715-5744913.pdf?src-supplier=Farnell, ComponentLink4Description=https://datasheet.ciiva.com/30199/43umk107bj105ka-t-30199791.pdf?src-supplier=Onlinecomponents.com, ComponentLink4URL=https://datasheet.ciiva.com/30199/43umk107bj105ka-t-30199791.pdf?src-supplier=Onlinecomponents.com, ComponentLink5Description=https://datasheet.ciiva.com/15922/336umk107bj105ka-t-15922611.pdf?src-supplier=Onlinecomponents.com, ComponentLink5URL=https://datasheet.ciiva.com/15922/336umk107bj105ka-t-15922611.pdf?src-supplier=Onlinecomponents.com, ComponentLink6Description=https://datasheet.ciiva.com/5427/mlcc-all-e-541559-5427036.pdf?src-supplier=Mouser, ComponentLink6URL=https://datasheet.ciiva.com/5427/mlcc-all-e-541559-5427036.pdf?src-supplier=Mouser, ComponentLink7Description=https://datasheet.ciiva.com/7975/mlcc-all-e-7975898.pdf?src-supplier=Element14, ComponentLink7URL=https://datasheet.ciiva.com/7975/mlcc-all-e-7975898.pdf?src-supplier=Element14, ComponentLink8Description=https://datasheet.ciiva.com/7975/1697715-7975608.pdf?src-supplier=Element14, ComponentLink8URL=https://datasheet.ciiva.com/7975/1697715-7975608.pdf?src-supplier=Element14, ComponentLink9Description=https://datasheet.ciiva.com/22694/1697715-22694278.pdf?src-supplier=Element14, ComponentLink9URL=https://datasheet.ciiva.com/22694/1697715-22694278.pdf?src-supplier=Element14, Construction=Flat, Contact Plating=Nickel, Depth=0.8mm, Halogen Free="Halogen Free", Height=0.8mm, Length=1.6mm, Mount="Surface Mount", Number of Pins=2, Packaging="Tape and Reel", Pricing 1="1=0.19000, 10=0.12900, 50=0.07760, 100=0.06560, 500=0.04484, 1000=0.03968 (USD)", Radiation Hardening=No, REACH SVHC=Unknown, RoHS=Yes, RoHS Compliant=Yes, Series=M, Stock 1=955108, Supplier 1=Digi-Key, Termination=SMD/SMT, Thickness=0.035inch, Voltage Rating (DC)=50V, Width=0.031inch
C4: library part "CAP CER 100pF 50V C0G 0402", "0402 100 pF 50 V ±5% Tolerance NP0/C0G Multilayer Ceramic Chip Capacitor", Case Code (Imperial)=0402, Case Code (Metric)=1005, Dielectric=C0G, Manufacturer=Yageo, Manufacturer Part Number=CC0402JPNPO9BN101, Max Operating Temperature=125°C, Min Operating Temperature=-55°C, Resistor Type=Ceramic, Supplier Part Number 1=13-CC0402JPNPO9BN101CT-ND, Tolerance=5%, Voltage Rating (DC)=50V, Capacitance=100pF, Case/Package=0402, Category="Ceramic Capacitors", ComponentLink1Description=http://www.mouser.com/ds/2/447/Yageo_UPY-GP_NP0_16V-to-50V_9-358835.pdf?src-supplier=Mouser, ComponentLink1URL=http://www.mouser.com/ds/2/447/Yageo_UPY-GP_NP0_16V-to-50V_9-358835.pdf?src-supplier=Mouser, ComponentLink2Description=http://components.arrow.com/part/dataview/0323_04038301?src-supplier=Arrow+Europe, ComponentLink2URL=http://components.arrow.com/part/dataview/0323_04038301?src-supplier=Arrow+Europe, Depth=0.5mm, Length=1mm, Packaging="Tape and Reel", Pricing 1="1=0.10000, 10=0.01900, 50=0.01040, 100=0.00850, 500=0.00604, 1000=0.00475, 2500=0.00432, 5000=0.00397 (USD)", RoHS=Yes, RoHS Compliant=Yes, Stock 1=83787, Supplier 1=Digi-Key, Termination=SMD/SMT, Weight=2.3E-05oz, Width=0.5mm
C8 C12 C14 C15 C18 C20 C21 C29: library part "CAP CER 10nF 16V Y5V 0402", "0402 10 nF 16 V -20 / +80 % Tolerance Y5V SMT Multilayer Ceramic Capacitor", Case Code (Imperial)=0402, Case Code (Metric)=1005, Dielectric=Y5V, Dielectric Material=Ceramic, Insulation Resistance=100GR, Manufacturer=Yageo, Manufacturer Part Number=CC0402ZRY5V7BB103, Max Operating Temperature=85°C, Min Operating Temperature=-55°C, Package Quantity=10000, Supplier Part Number 1=1300987, Tolerance=80%, Voltage Rating=16V, Capacitance=10nF, Case/Package=0402, Category="Ceramic Capacitors", ComponentLink1Description=https://datasheet.ciiva.com/144/mlccorderingcode-144484.pdf?src-supplier=Digi-Key, ComponentLink1URL=https://datasheet.ciiva.com/144/mlccorderingcode-144484.pdf?src-supplier=Digi-Key, ComponentLink2Description=https://datasheet.ciiva.com/144/mlccorderingcode-144485.pdf?src-supplier=Digi-Key, ComponentLink2URL=https://datasheet.ciiva.com/144/mlccorderingcode-144485.pdf?src-supplier=Digi-Key, ComponentLink3Description=https://datasheet.ciiva.com/144/mlccorderingcode-144486.pdf?src-supplier=Digi-Key, ComponentLink3URL=https://datasheet.ciiva.com/144/mlccorderingcode-144486.pdf?src-supplier=Digi-Key, ComponentLink4Description=https://datasheet.ciiva.com/11586/upy-gphc-y5v-6-3v-to-50v-5-11586517.pdf?src-supplier=Avnet, ComponentLink4URL=https://datasheet.ciiva.com/11586/upy-gphc-y5v-6-3v-to-50v-5-11586517.pdf?src-supplier=Avnet, ComponentLink5Description=https://datasheet.ciiva.com/5789/1132289-5789565.pdf?src-supplier=Farnell, ComponentLink5URL=https://datasheet.ciiva.com/5789/1132289-5789565.pdf?src-supplier=Farnell, ComponentLink6Description=https://datasheet.ciiva.com/5789/1132289-5789566.pdf?src-supplier=Farnell, ComponentLink6URL=https://datasheet.ciiva.com/5789/1132289-5789566.pdf?src-supplier=Farnell, ComponentLink7Description=https://datasheet.ciiva.com/17437/upy-gphc-y5v-6-3v-to-50v-5-17437221.pdf?src-supplier=Avnet+Europe, ComponentLink7URL=https://datasheet.ciiva.com/17437/upy-gphc-y5v-6-3v-to-50v-5-17437221.pdf?src-supplier=Avnet+Europe, ComponentLink8Description=https://datasheet.ciiva.com/8033/1132289-8033641.pdf?src-supplier=Element14, ComponentLink8URL=https://datasheet.ciiva.com/8033/1132289-8033641.pdf?src-supplier=Element14, ComponentLink9Description=https://datasheet.ciiva.com/8033/1132289-8033642.pdf?src-supplier=Element14, ComponentLink9URL=https://datasheet.ciiva.com/8033/1132289-8033642.pdf?src-supplier=Element14, Construction=Flat, Depth=0.5mm, Halogen Free="Halogen Free", Height=0.5mm, Lead Free="Lead Free", Length=1mm, Mount="Surface Mount", Number of Pins=2, Packaging="Tape and Reel", Pricing 1="10000=0.00340, 30000=0.00320, 100000=0.00300, 200000=0.00290, 400000=0.00270 (USD)", Radiation Hardening=No, REACH SVHC="No SVHC", RoHS=Yes, RoHS Compliant=Yes, Series=CC, Stock 1=10000, Supplier 1="Future Electronics", Terminal Length=0.225mm, Termination=SMD/SMT, Thickness=0.022inch, Voltage Rating (DC)=16V, Width=0.02inch
C23 C24 C26: library part "CAP CER 12pF 50V C0G 0402", "Ceramic capacitor SMD-0402 12pF /50V C0G# J +-5%, Samsung, RoHS", Case Code (Imperial)=0402, Case Code (Metric)=1005, Dielectric=C0G, Manufacturer=Samsung, Manufacturer Part Number=CL05C120JB5NNNC, Max Operating Temperature=125°C, Min Operating Temperature=-55°C, Package Quantity=1, Supplier Part Number 1=1276-1178-2-ND, Temperature Coefficient=300ppm/°C, Tolerance=5%, Voltage=50V, Capacitance=12pF, Case/Package=0402, Category="Ceramic Capacitors", ComponentLink1Description=https://datasheet.ciiva.com/25806/cl05c120jb5nnnc-25806484.pdf?src-supplier=Digi-Key, ComponentLink1URL=https://datasheet.ciiva.com/25806/cl05c120jb5nnnc-25806484.pdf?src-supplier=Digi-Key, ComponentLink2Description=https://datasheet.ciiva.com/26838/getdatasheetpartid-658047-26838280.pdf?src-supplier=Verical, ComponentLink2URL=https://datasheet.ciiva.com/26838/getdatasheetpartid-658047-26838280.pdf?src-supplier=Verical, ComponentLink3Description=https://datasheet.ciiva.com/29198/458703-da-01-en-vs-kondensator-0402-29198421.pdf?src-supplier=Conrad, ComponentLink3URL=https://datasheet.ciiva.com/29198/458703-da-01-en-vs-kondensator-0402-29198421.pdf?src-supplier=Conrad, ComponentLink4Description=https://datasheet.ciiva.com/16449/cl05b104kq5nnnc-16449055.pdf?src-supplier=Future+Electronics, ComponentLink4URL=https://datasheet.ciiva.com/16449/cl05b104kq5nnnc-16449055.pdf?src-supplier=Future+Electronics, Construction=Flat, Contact Plating=Tin, Depth=0.5mm, Height=0.5mm, Lead Free="Lead Free", Length=1mm, Material=Ceramic, Mount="Surface Mount", Packaging="Tape and Reel", Pricing 1="10000=0.00386, 20000=0.00367 (USD)", Radiation Hardening=No, RoHS=Yes, RoHS Compliant=Yes, Series=CL, Stock 1=41998, Supplier 1=Digi-Key, Thickness=0.022inch, Voltage Rating=50V, Voltage Rating (DC)=50V, Width=0.02inch
C31 C38 C49: library part "CAP CER 47pF 50V C0G 0402", "Ceramic capacitor SMD-0402 47pF /50V C0G # K +-5%, Samsung, RoHS", Case Code (Imperial)=0402, Case Code (Metric)=1005, Dielectric=C0G, Manufacturer=Samsung, Manufacturer Part Number=CL05C470JB5NNNC, Max Operating Temperature=125°C, Min Operating Temperature=-55°C, Package Quantity=1, Supplier Part Number 1=7661435, Temperature Coefficient=300ppm/°C, Tolerance=5%, Voltage=50V, Capacitance=47pF, Case/Package=0402, Category="Ceramic Capacitors", ComponentLink1Description=https://datasheet.ciiva.com/15195/getdatasheetpartid-466159-15195693.pdf?src-supplier=Verical, ComponentLink1URL=https://datasheet.ciiva.com/15195/getdatasheetpartid-466159-15195693.pdf?src-supplier=Verical, ComponentLink2Description=https://datasheet.ciiva.com/29198/458555-da-01-en-vs-kondensator-0402-29198397.pdf?src-supplier=Conrad, ComponentLink2URL=https://datasheet.ciiva.com/29198/458555-da-01-en-vs-kondensator-0402-29198397.pdf?src-supplier=Conrad, ComponentLink3Description=https://datasheet.ciiva.com/16297/cl05b104kq5nnnc-16297131.pdf?src-supplier=Future+Electronics, ComponentLink3URL=https://datasheet.ciiva.com/16297/cl05b104kq5nnnc-16297131.pdf?src-supplier=Future+Electronics, Construction=Flat, Contact Plating=Tin, Depth=0.5mm, Height=0.5mm, Length=1mm, Material=Ceramic, Mount="Surface Mount", Packaging="Tape and Reel", Pricing 1="10000=0.00300, 30000=0.00300, 50000=0.00300, 100000=0.00300, 250000=0.00200 (GBP)", Radiation Hardening=No, RoHS=Yes, RoHS Compliant=Yes, Series=CL, Stock 1=130000, Supplier 1=RSComponents, Thickness=0.022inch, Voltage Rating=50V, Width=0.02inch
C32: library part "CAP ALUM 220uF 25V 8x11.5mm TH", "CAP ALUM 220UF 20% 25V RADIAL", Case/Package=Radial, Manufacturer=Rubycon, Manufacturer Part Number=25YXF220MEFCT78X11.5, Max Operating Temperature=105°C, Min Operating Temperature=-40°C, Package Quantity=2000, Ripple Current=280mA, Supplier Part Number 1=1189-3720-1-ND, Tolerance=20%, Voltage Rating=25V, Capacitance=220uF, Category="Aluminum Electrolytic Capacitors", ComponentLink1Description=https://datasheet.ciiva.com/6318/e-yxf-6318234.pdf?src-supplier=Digi-Key, ComponentLink1URL=https://datasheet.ciiva.com/6318/e-yxf-6318234.pdf?src-supplier=Digi-Key, ComponentLink2Description=https://datasheet.ciiva.com/17512/e-yxf-17512937.pdf?src-supplier=Avnet+Europe, ComponentLink2URL=https://datasheet.ciiva.com/17512/e-yxf-17512937.pdf?src-supplier=Avnet+Europe, Diameter=8mm, Height=11.5mm, Height - Seated (Max)=0.512inch, Impedance=250mR, Lead Pitch=0.138inch, Life (Hours)=7000Hour, Mount="Through Hole", Packaging="Tape and Reel", Pricing 1="1=0.37000, 10=0.26000, 50=0.18180, 100=0.15590, 500=0.11692 (USD)", Radiation Hardening=No, RoHS=Yes, RoHS Compliant=Yes, Series=YXF, Stock 1=1712, Supplier 1=Digi-Key, Termination=Radial
C33 C44 C45 C46 C55 C60: library part "CAP CER 10uF 25V X5R 0805", "Cap Ceramic 10uF 25V X5R 10% SMD 0805 85°C Embossed T/R", Case Code (Imperial)=0805, Case Code (Metric)=2012, Dielectric=X5R, Manufacturer=Samsung, Manufacturer Part Number=CL21A106KAYNNNE, Max Operating Temperature=85°C, Min Operating Temperature=-55°C, Package Quantity=1, Supplier Part Number 1=1276-2891-2-ND, Tolerance=10%, Voltage Rating=25V, Capacitance=10uF, Case/Package=0805, Category="Ceramic Capacitors", ComponentLink1Description=https://datasheet.ciiva.com/25796/cl21a106kaynnne-25796720.pdf?src-supplier=Digi-Key, ComponentLink1URL=https://datasheet.ciiva.com/25796/cl21a106kaynnne-25796720.pdf?src-supplier=Digi-Key, ComponentLink2Description=https://datasheet.ciiva.com/26838/getdatasheetpartid-357558-26838583.pdf?src-supplier=Verical, ComponentLink2URL=https://datasheet.ciiva.com/26838/getdatasheetpartid-357558-26838583.pdf?src-supplier=Verical, Construction=Flat, Depth=1.25mm, Height=1.25mm, Length=2mm, Mount="Surface Mount", Packaging="Tape and Reel", Pricing 1="2000=0.03549, 4000=0.03247 (USD)", Radiation Hardening=No, RoHS=Yes, RoHS Compliant=Yes, Series=CL, Stock 1=2266338, Supplier 1=Digi-Key, Thickness=0.057inch, Width=0.049inch
C36 C37: library part "CAP PTANT 100uF 6.3V 20% B", "Capacitor Tantalum Polymer 100uF 20% 6.3V 2-Pin Surface Mount T/R", Manufacturer="Kyocera AVX", Manufacturer Part Number=TCJB107M006R0055E, Supplier Part Number 1=478-13221-1-ND, Voltage Rating=6.3V, Pricing 1="1=0.76000, 10=0.56400, 50=0.45080, 100=0.38640, 500=0.30590, 1000=0.25760 (USD)", RoHS=Yes, Stock 1=3593, Supplier 1=Digi-Key
C40 C41 C51 C52: library part "CAP CER 22uF 6.3V X5R 0805", "CAP CER 22UF 6.3V X5R 0805 / Cap Ceramic 22uF 6.3V X5R 20% Pad SMD 0805 85¡ãC T/R", Case Code (Imperial)=0805, Case Code (Metric)=2012, Dielectric=X5R, Manufacturer=Samsung, Manufacturer Part Number=CL21A226MQQNNNE, Max Operating Temperature=85°C, Min Operating Temperature=-55°C, Package Quantity=2000, Supplier Part Number 1=1276-1100-1-ND, Tolerance=20%, Voltage Rating=6.3V, Capacitance=22uF, Case/Package=0805, Category="Ceramic Capacitors", ComponentLink1Description=https://datasheet.ciiva.com/25796/cl21a226mqqnnne-25796195.pdf?src-supplier=Digi-Key, ComponentLink1URL=https://datasheet.ciiva.com/25796/cl21a226mqqnnne-25796195.pdf?src-supplier=Digi-Key, ComponentLink2Description=https://datasheet.ciiva.com/26838/getdatasheetpartid-357607-26838611.pdf?src-supplier=Verical, ComponentLink2URL=https://datasheet.ciiva.com/26838/getdatasheetpartid-357607-26838611.pdf?src-supplier=Verical, ComponentLink3Description=https://datasheet.ciiva.com/16361/cl21a226mqqnnne-16361189.pdf?src-supplier=Future+Electronics, ComponentLink3URL=https://datasheet.ciiva.com/16361/cl21a226mqqnnne-16361189.pdf?src-supplier=Future+Electronics, ComponentLink4Description=https://datasheet.ciiva.com/26787/cl21a226mqqnnne-26787006.pdf?src-supplier=IIIC, ComponentLink4URL=https://datasheet.ciiva.com/26787/cl21a226mqqnnne-26787006.pdf?src-supplier=IIIC, Contact Plating=Tin, Depth=1.25mm, Height=1.25mm, Lead Free="Lead Free", Length=0.079inch, Mount="Surface Mount", Packaging="Tape and Reel", Pricing 1="1=0.14000, 10=0.10200, 50=0.05780, 100=0.04780, 500=0.03356, 1000=0.02778 (USD)", Radiation Hardening=No, RoHS=Yes, RoHS Compliant=Yes, Series=CL, Stock 1=657907, Supplier 1=Digi-Key, Thickness=0.055inch, Voltage Rating (DC)=6.3V, Width=0.049inch
C54 C59: library part "CAP CER 4.7uF 25V X5R 0805", "Cap Ceramic 4.7uF 25V X5R 10% SMD 0805 85C Embossed T/R", Case Code (Imperial)=0805, Case Code (Metric)=2012, Dielectric=X5R, Manufacturer=Samsung, Manufacturer Part Number=CL21A475KAQNNNE, Max Operating Temperature=85°C, Min Operating Temperature=-55°C, Package Quantity=1, Supplier Part Number 1=1276-1244-1-ND, Tolerance=10%, Voltage Rating=25V, Capacitance=4.7uF, Case/Package=0805, Category="Ceramic Capacitors", ComponentLink1Description=https://datasheet.ciiva.com/25798/cl21a475kaqnnne-25798882.pdf?src-supplier=Digi-Key, ComponentLink1URL=https://datasheet.ciiva.com/25798/cl21a475kaqnnne-25798882.pdf?src-supplier=Digi-Key, Construction=Flat, Depth=1.25mm, Height=1.25mm, Lead Free="Lead Free", Length=2mm, Mount="Surface Mount", Packaging="Tape and Reel", Pricing 1="1=0.11000, 10=0.08000, 50=0.04520, 100=0.03740, 500=0.02624, 1000=0.02172 (USD)", Radiation Hardening=No, RoHS=Yes, RoHS Compliant=Yes, Series=CL, Stock 1=3540, Supplier 1=Digi-Key, Thickness=0.055inch, Voltage Rating (DC)=25V, Width=0.049inch
C64 C65: library part "CAP CER 680pF 50V C0G 0402", "Cap Ceramic 680pF 50V C0G 5% SMD 0402 125°C Paper T/R", Case Code (Imperial)=0402, Case Code (Metric)=1005, Dielectric=C0G, Manufacturer=Samsung, Manufacturer Part Number=CL05C681JB5NNNC, Max Operating Temperature=125°C, Min Operating Temperature=-55°C, Supplier Part Number 1=82AC9265, Tolerance=5%, Voltage Rating=50V, Capacitance=680pF, Case/Package=0402, Category="Ceramic Capacitors", ComponentLink1Description=https://datasheet.ciiva.com/25711/cl05c681jb5nnnc-25711552.pdf?src-supplier=Digi-Key, ComponentLink1URL=https://datasheet.ciiva.com/25711/cl05c681jb5nnnc-25711552.pdf?src-supplier=Digi-Key, ComponentLink2Description=https://datasheet.ciiva.com/16200/cl05c681jb5nnnc-16200558.pdf?src-supplier=Future+Electronics, ComponentLink2URL=https://datasheet.ciiva.com/16200/cl05c681jb5nnnc-16200558.pdf?src-supplier=Future+Electronics, Construction=Flat, Depth=0.5mm, Height=0.5mm, Lead Free="Lead Free", Length=1mm, Mount="Surface Mount", Packaging="Tape and Reel", Pricing 1="1=0.00500, 25=0.00500, 100=0.00500, 250=0.00500, 500=0.00500, 1000=0.00500 (USD)", Radiation Hardening=No, RoHS=Yes, RoHS Compliant=Yes, Series=CL, Stock 1=45700, Supplier 1=Newark, Thickness=0.022inch, Voltage Rating (DC)=50V, Width=0.02inch
C66: library part "CAP CER 220pF 50V C0G 0402", "Multilayer Ceramic Capacitor, 220 Pf, 5%, C0G / Np0, 50 V, 0402 [1005 Metric] Rohs Compliant: Yes", Case Code (Imperial)=0402, Case Code (Metric)=1005, Dielectric=C0G, Insulation Resistance=10GR, Manufacturer="Walsin Technologies", Manufacturer Part Number=0402N221J500CT, Max Operating Temperature=125°C, Min Operating Temperature=-55°C, Supplier Part Number 1=58Y7643, Tolerance=5%, Voltage Rating=50V, Capacitance=220pF, Case/Package=0402, Category="Ceramic Capacitors", ComponentLink1Description=https://datasheet.ciiva.com/26864/getdatasheetpartid-414404-26864480.pdf?src-supplier=Verical, ComponentLink1URL=https://datasheet.ciiva.com/26864/getdatasheetpartid-414404-26864480.pdf?src-supplier=Verical, Depth=0.5mm, Lead Free="Lead Free", Length=1mm, Packaging="Tape and Reel", Pricing 1="1=0.00600, 10000=0.00600, 20000=0.00500 (USD)", Radiation Hardening=No, REACH SVHC=Unknown, RoHS=Yes, RoHS Compliant=Yes, Stock 1=50000, Supplier 1=Newark, Voltage Rating (DC)=50V
D1 D2 D3 D4: library part NSR05T40XV2T5G, "500 mA, 40 V, Schottky Barrier Diode Schottky Barrier Diode, 500 mA, 40 V", Average Rectified Current=500mA, Case/Package=SOD, Forward Voltage=640mV, Manufacturer="ON Semiconductor", Max Forward Surge Current (Ifsm)=3A, Max Operating Temperature=150°C, Supplier Part Number 1=NSR05T40XV2T5GOSCT-ND, Category="Schottky Diodes", ComponentLink1Description=http://www.farnell.com/datasheets/2118285.pdf?src-supplier=Farnell, ComponentLink1URL=http://www.farnell.com/datasheets/2118285.pdf?src-supplier=Farnell, ComponentLink2Description=http://www.onsemi.com/pub/Collateral/NSR05T40XV2-D.PDF?src-supplier=Digi-Key, ComponentLink2URL=http://www.onsemi.com/pub/Collateral/NSR05T40XV2-D.PDF?src-supplier=Digi-Key, ComponentLink3Description=http://www.farnell.com/datasheets/2118285.pdf?src-supplier=Element14, ComponentLink3URL=http://www.farnell.com/datasheets/2118285.pdf?src-supplier=Element14, Element Configuration=Single, Forward Current=500mA, Lead Free="Lead Free", Manufacturer Part Number=NSR05T40XV2T5G, Max Repetitive Reverse Voltage (Vrrm)=40V, Max Reverse Voltage (DC)=40V, Mount="Surface Mount", Number of Pins=2, Packaging="Cut Tape", Pricing 1="1=0.39000, 10=0.31700, 100=0.16800, 500=0.11050, 1000=0.07514, 2000=0.06778 (USD)", REACH SVHC="No SVHC", Reverse Recovery Time=20ns, RoHS=Yes, RoHS Compliant=Yes, Stock 1=15606, Supplier 1=Digi-Key
FB1 FB2: library part "FB 68R 400mA 310mR 0402", "Ferrite Beads Multi-Layer 68Ohm 25% 100MHz 400mA 310mOhm DCR 0402 T/R", Case Code (Imperial)=0402, Case Code (Metric)=1005, DC Resistance (DCR)=310mR, Frequency=100MHz, Manufacturer="Taiyo Yuden", Manufacturer Part Number=BK1005LL680-T, Max Current Rating=400mA, Max Operating Temperature=125°C, Min Operating Temperature=-55°C, Package Quantity=1, Supplier Part Number 1=587-1860-1-ND, Tolerance=25%, Case/Package=0402, Category="Ferrite Beads and Chips", ComponentLink1Description=https://datasheet.ciiva.com/1013/bk1005ll680-t-ss-1013936.pdf?src-supplier=Digi-Key, ComponentLink1URL=https://datasheet.ciiva.com/1013/bk1005ll680-t-ss-1013936.pdf?src-supplier=Digi-Key, ComponentLink2Description=https://datasheet.ciiva.com/1013/mlci07-e-1013935.pdf?src-supplier=Digi-Key, ComponentLink2URL=https://datasheet.ciiva.com/1013/mlci07-e-1013935.pdf?src-supplier=Digi-Key, ComponentLink3Description=https://datasheet.ciiva.com/1013/mlci07-e-1013937.pdf?src-supplier=Digi-Key, ComponentLink3URL=https://datasheet.ciiva.com/1013/mlci07-e-1013937.pdf?src-supplier=Digi-Key, Core Material=Ferrite, Depth=0.55mm, Halogen Free="Halogen Free", Height=0.022inch, Impedance=68R, Lead Free="Lead Free", Length=0.039inch, Max DC Current=400mA, Mount="Surface Mount", Number of Lines=1, Number of Pins=2, Packaging="Tape and Reel", Pricing 1="1=0.10000, 10=0.04100, 25=0.03640, 50=0.03300, 100=0.02970, 250=0.02176, 500=0.01584, 1000=0.01551, 5000=0.01056 (USD)", REACH SVHC=Unknown, RoHS=Yes, Series=BK, Shielding=Unshielded, Stock 1=9707, Supplier 1=Digi-Key, Termination=SMD/SMT, Test Frequency=100MHz, Width=0.02inch
J1: library part "CONN SPKR JACK RA TH SJ-2509N", "2.5 mm, Stereo, Right Angle, Through Hole, Audio Jack Connector", Manufacturer="CUI Devices", Supplier Part Number 1=CP-S2509N-ND, Category="Audio / Video Connectors", Manufacturer Part Number=SJ-2509N, Pricing 1="1=0.73000, 10=0.63300, 25=0.57880, 50=0.54480, 100=0.52210, 250=0.47664, 500=0.45396, 1000=0.37452, 2500=0.34047 (USD)", RoHS=Yes, Stock 1=21425, Supplier 1=Digi-Key
J2 J3: library part "CONN TERM 2 5mm 691137710002", "Series 1377 - 5.00 mm Horizontal Entry with Pressure Clamp WR-TBL, 2 pin", Color=Green, Current=16A, Manufacturer="Wurth Electronics", Max Operating Temperature=120°C, Min Operating Temperature=-30°C, Supplier Part Number 1=1769908, Voltage=300V, Category="Terminal Blocks", ComponentLink1Description=https://katalog.we-online.de/em/datasheet/691137710002.pdf?src-supplier=Digi-Key, ComponentLink1URL=https://katalog.we-online.de/em/datasheet/691137710002.pdf?src-supplier=Digi-Key, Housing Material=PC, Manufacturer Part Number=691137710002, Mount="Through Hole", Number of Levels=1, Number of Positions Per Level=2, Packaging=Bulk, Plating="Copper Alloy", Pricing 1="500=0.28300, 1000=0.26300, 2500=0.24500 (USD)", RoHS=No, Stock 1=201, Supplier 1=RSComponents, Termination=Screw, Wire Gauge (Max)=30AWG, Wire Gauge (Min)=12AWG
L1 L2: library part "IND 6.8uH 2.3A 67mR 5050", "Inductor Power Shielded Wirewound 6.8uH 20% 100KHz Ferrite 2.3A 0.0676Ohm DCR T/R", Case/Package=5030, Current Rating=2.3A, DC Resistance (DCR)=52mR, Manufacturer="Taiyo Yuden", Manufacturer Part Number=NRS5030T6R8MMGJ, Max DC Current=2.5A, Max Operating Temperature=120°C, Min Operating Temperature=-25°C, Package Quantity=500, Self Resonant Frequency=22MHz, Supplier Part Number 1=587-3462-1-ND, Test Frequency=100kHz, Tolerance=20%, Category="Fixed Inductors", ComponentLink1Description=https://datasheet.ciiva.com/18686/wound04-e-18686409.pdf?src-supplier=Digi-Key, ComponentLink1URL=https://datasheet.ciiva.com/18686/wound04-e-18686409.pdf?src-supplier=Digi-Key, ComponentLink2Description=https://datasheet.ciiva.com/18686/wound04-e-18686410.pdf?src-supplier=Digi-Key, ComponentLink2URL=https://datasheet.ciiva.com/18686/wound04-e-18686410.pdf?src-supplier=Digi-Key, ComponentLink3Description=https://datasheet.ciiva.com/18686/wound04-e-18686411.pdf?src-supplier=Digi-Key, ComponentLink3URL=https://datasheet.ciiva.com/18686/wound04-e-18686411.pdf?src-supplier=Digi-Key, Core Material=Ferrite, Depth=4.9mm, Halogen Free="Halogen Free", Height=3.1mm, Height - Seated (Max)=0.122inch, Inductance=6.8uH, Length=0.193inch, Mount="Surface Mount", Packaging="Tape and Reel", Pricing 1="1=0.37000, 10=0.32600, 25=0.28480, 50=0.24420, 100=0.22380, 250=0.20352 (USD)", Radiation Hardening=No, RoHS=Yes, RoHS Compliant=Yes, Saturation Current=2.5A, Shielding=Shielded, Stock 1=6678, Supplier 1=Digi-Key, Termination=SMD/SMT, Width=0.193inch
L3 L4: library part "IND 22uH COMBO 8x8smd toroid 2A+", "Inductor Power Shielded Wirewound 22uH 20% 100KHz Ferrite 2.2A 0.0858Ohm DCR 3131 T/R", Case/Package=3131, Current Rating=2.2A+, DC Resistance (DCR)=85.8mR, Inductance=22uH, Inductance Tolerance=20%, Manufacturer="Taiyo Yuden", Manufacturer Part Number=NR8040T220M, Max DC Current=2.2A, Max Operating Temperature=120°C, Min Operating Temperature=-25°C, Package Quantity=1000, Resistor Type=Wirewound, Self Resonant Frequency=13MHz, Supplier Part Number 1=587-2002-1-ND, Test Frequency=100kHz, Category="Fixed Inductors", ComponentLink1Description=https://datasheet.ciiva.com/7291/1706789-7291882.pdf?src-supplier=Newark, ComponentLink1URL=https://datasheet.ciiva.com/7291/1706789-7291882.pdf?src-supplier=Newark, ComponentLink2Description=https://datasheet.ciiva.com/8002/nr8040t220m-ss-8002169.pdf?src-supplier=Element14, ComponentLink2URL=https://datasheet.ciiva.com/8002/nr8040t220m-ss-8002169.pdf?src-supplier=Element14, ComponentLink3Description=https://datasheet.ciiva.com/8505/nr8040t220m-ss-8505667.pdf?src-supplier=Avnet, ComponentLink3URL=https://datasheet.ciiva.com/8505/nr8040t220m-ss-8505667.pdf?src-supplier=Avnet, ComponentLink4Description=https://datasheet.ciiva.com/15988/268nr8040t220m-15988126.pdf?src-supplier=Onlinecomponents.com, ComponentLink4URL=https://datasheet.ciiva.com/15988/268nr8040t220m-15988126.pdf?src-supplier=Onlinecomponents.com, ComponentLink5Description=https://datasheet.ciiva.com/1045/wound04-e-1045229.pdf?src-supplier=Digi-Key, ComponentLink5URL=https://datasheet.ciiva.com/1045/wound04-e-1045229.pdf?src-supplier=Digi-Key, ComponentLink6Description=https://datasheet.ciiva.com/1045/wound04-e-1045228.pdf?src-supplier=Digi-Key, ComponentLink6URL=https://datasheet.ciiva.com/1045/wound04-e-1045228.pdf?src-supplier=Digi-Key, ComponentLink7Description=https://datasheet.ciiva.com/1045/wound04-e-1045230.pdf?src-supplier=Digi-Key, ComponentLink7URL=https://datasheet.ciiva.com/1045/wound04-e-1045230.pdf?src-supplier=Digi-Key, Core Material=Ferrite, Halogen Free="Halogen Free", Height=4mm, Height - Seated (Max)=0.157inch, Length=0.315inch, Mount="Surface Mount", Number of Pins=2, Packaging="Tape and Reel", Pricing 1="1=0.59000, 10=0.52000, 25=0.48280, 50=0.40840, 100=0.37120, 250=0.34896, 500=0.31184 (USD)", REACH SVHC=Unknown, RMS Current (Irms)=2.2A, RoHS=Yes, RoHS Compliant=Yes, Saturation Current=2.2A, Series=NR, Shielding=Shielded, Stock 1=488, Supplier 1=Digi-Key, Termination=SMD/SMT, Tolerance=20%, Width=8mm
M1 M2 M3 M4: library part "MECH M2.0 CHASSIS"
MK1: library part "MICROPHONE MEMS SMD CMM-2718AT-42308-TR", "2.75 x 1.85 mm, Analog, Top Port, Surface Mount, 2.0 Vdc, -42 ±3 dB, MEMS Microphone", Manufacturer="CUI Devices", Supplier Part Number 1=102-5092-1-ND, Category=Microphones, Manufacturer Part Number=CMM-2718AT-42308-TR, Pricing 1="1=0.88000, 10=0.73800, 25=0.68360, 50=0.64380, 100=0.60560, 500=0.52196 (USD)", RoHS=Yes, RoHS Compliant=Yes, Stock 1=1358, Supplier 1=Digi-Key
Q1 Q2 Q3 Q4: library part "TRANS CMOS 30V SOT963 DMC31D5UDJ-7", "Complementary Pair Enhancement Mode Mosfet, N+p, 30V Vds, 12±V Vgs", Capacitance=2.22E-11F, Case/Package=SOT-963, Continuous Drain Current (ID)=200mA, Drain to Source Resistance=5.1R, Drain to Source Voltage (Vdss)=30V, Gate to Source Voltage (Vgs)=12V, Input Capacitance=22.6pF, Manufacturer=Diodes, Max Operating Temperature=150°C, Max Power Dissipation=350mW, Min Operating Temperature=-55°C, Package Quantity=10000, Supplier Part Number 1=DMC31D5UDJ-7DICT-ND, Category=MOSFETs, ComponentLink1Description=http://www.mouser.com/ds/2/115/DMC31D5UDJ-355884.pdf?src-supplier=Mouser, ComponentLink1URL=http://www.mouser.com/ds/2/115/DMC31D5UDJ-355884.pdf?src-supplier=Mouser, Fall Time=8.7ns, FET Type="N and P-Channel", Manufacturer Part Number=DMC31D5UDJ-7, Mount="Surface Mount", Number of Channels=2, Packaging="Tape and Reel", Pricing 1="1=0.46000, 10=0.39000, 100=0.29110, 500=0.22868, 1000=0.17672, 2000=0.16112, 5000=0.15073 (USD)", Rds On Max=1.5R, Rise Time=5.2ns, RoHS=Yes, RoHS Compliant=Yes, Stock 1=103163, Supplier 1=Digi-Key, Turn-Off Delay Time=18.8ns, Turn-On Delay Time=3.5ns
Q5 Q6: library part "TRANS CMOS 60V 34mR 8-PDFN TSM6502CR RLG", "-60V, -18A, Complementary P-Channel Power MOSFET; 60V, 24A, Complementary N-Channel Power MOSFET", Continuous Drain Current (ID)=18A, Drain to Source Voltage (Vdss)=60V, Input Capacitance=1.159nF, Manufacturer="Taiwan Semiconductor", Max Operating Temperature=150°C, Max Power Dissipation=40W, Min Operating Temperature=-55°C, Supplier Part Number 1=TSM6502CRRLGCT-ND, ComponentLink1Description=http://www.taiwansemi.com/products/datasheet/TSM6502CR_A1701.pdf?src-supplier=Digi-Key, ComponentLink1URL=http://www.taiwansemi.com/products/datasheet/TSM6502CR_A1701.pdf?src-supplier=Digi-Key, FET Type="N and P-Channel", Manufacturer Part Number="TSM6502CR RLG", Mount="Surface Mount", Number of Pins=8, Packaging="Cut Tape", Pricing 1="1=2.48000, 10=2.23200, 100=1.79380, 500=1.47378, 1000=1.22113 (USD)", Rds On Max=34mR, RoHS=Yes, Stock 1=4997, Supplier 1=Digi-Key